# Altium PCB PCB1.PcbDoc
Units mm, origin at the board's own origin, x right, y up, seen from the top; angles counter-clockwise.
Board outline 150.13 x 90 mm, 4 copper layers (Top, GND02, PWR03, BOTTOM), stack 0.603 mm thick; 256 components, 186 nets, 779 pads, 0 vias.
Unrouted connection lines stored in the file: 541.
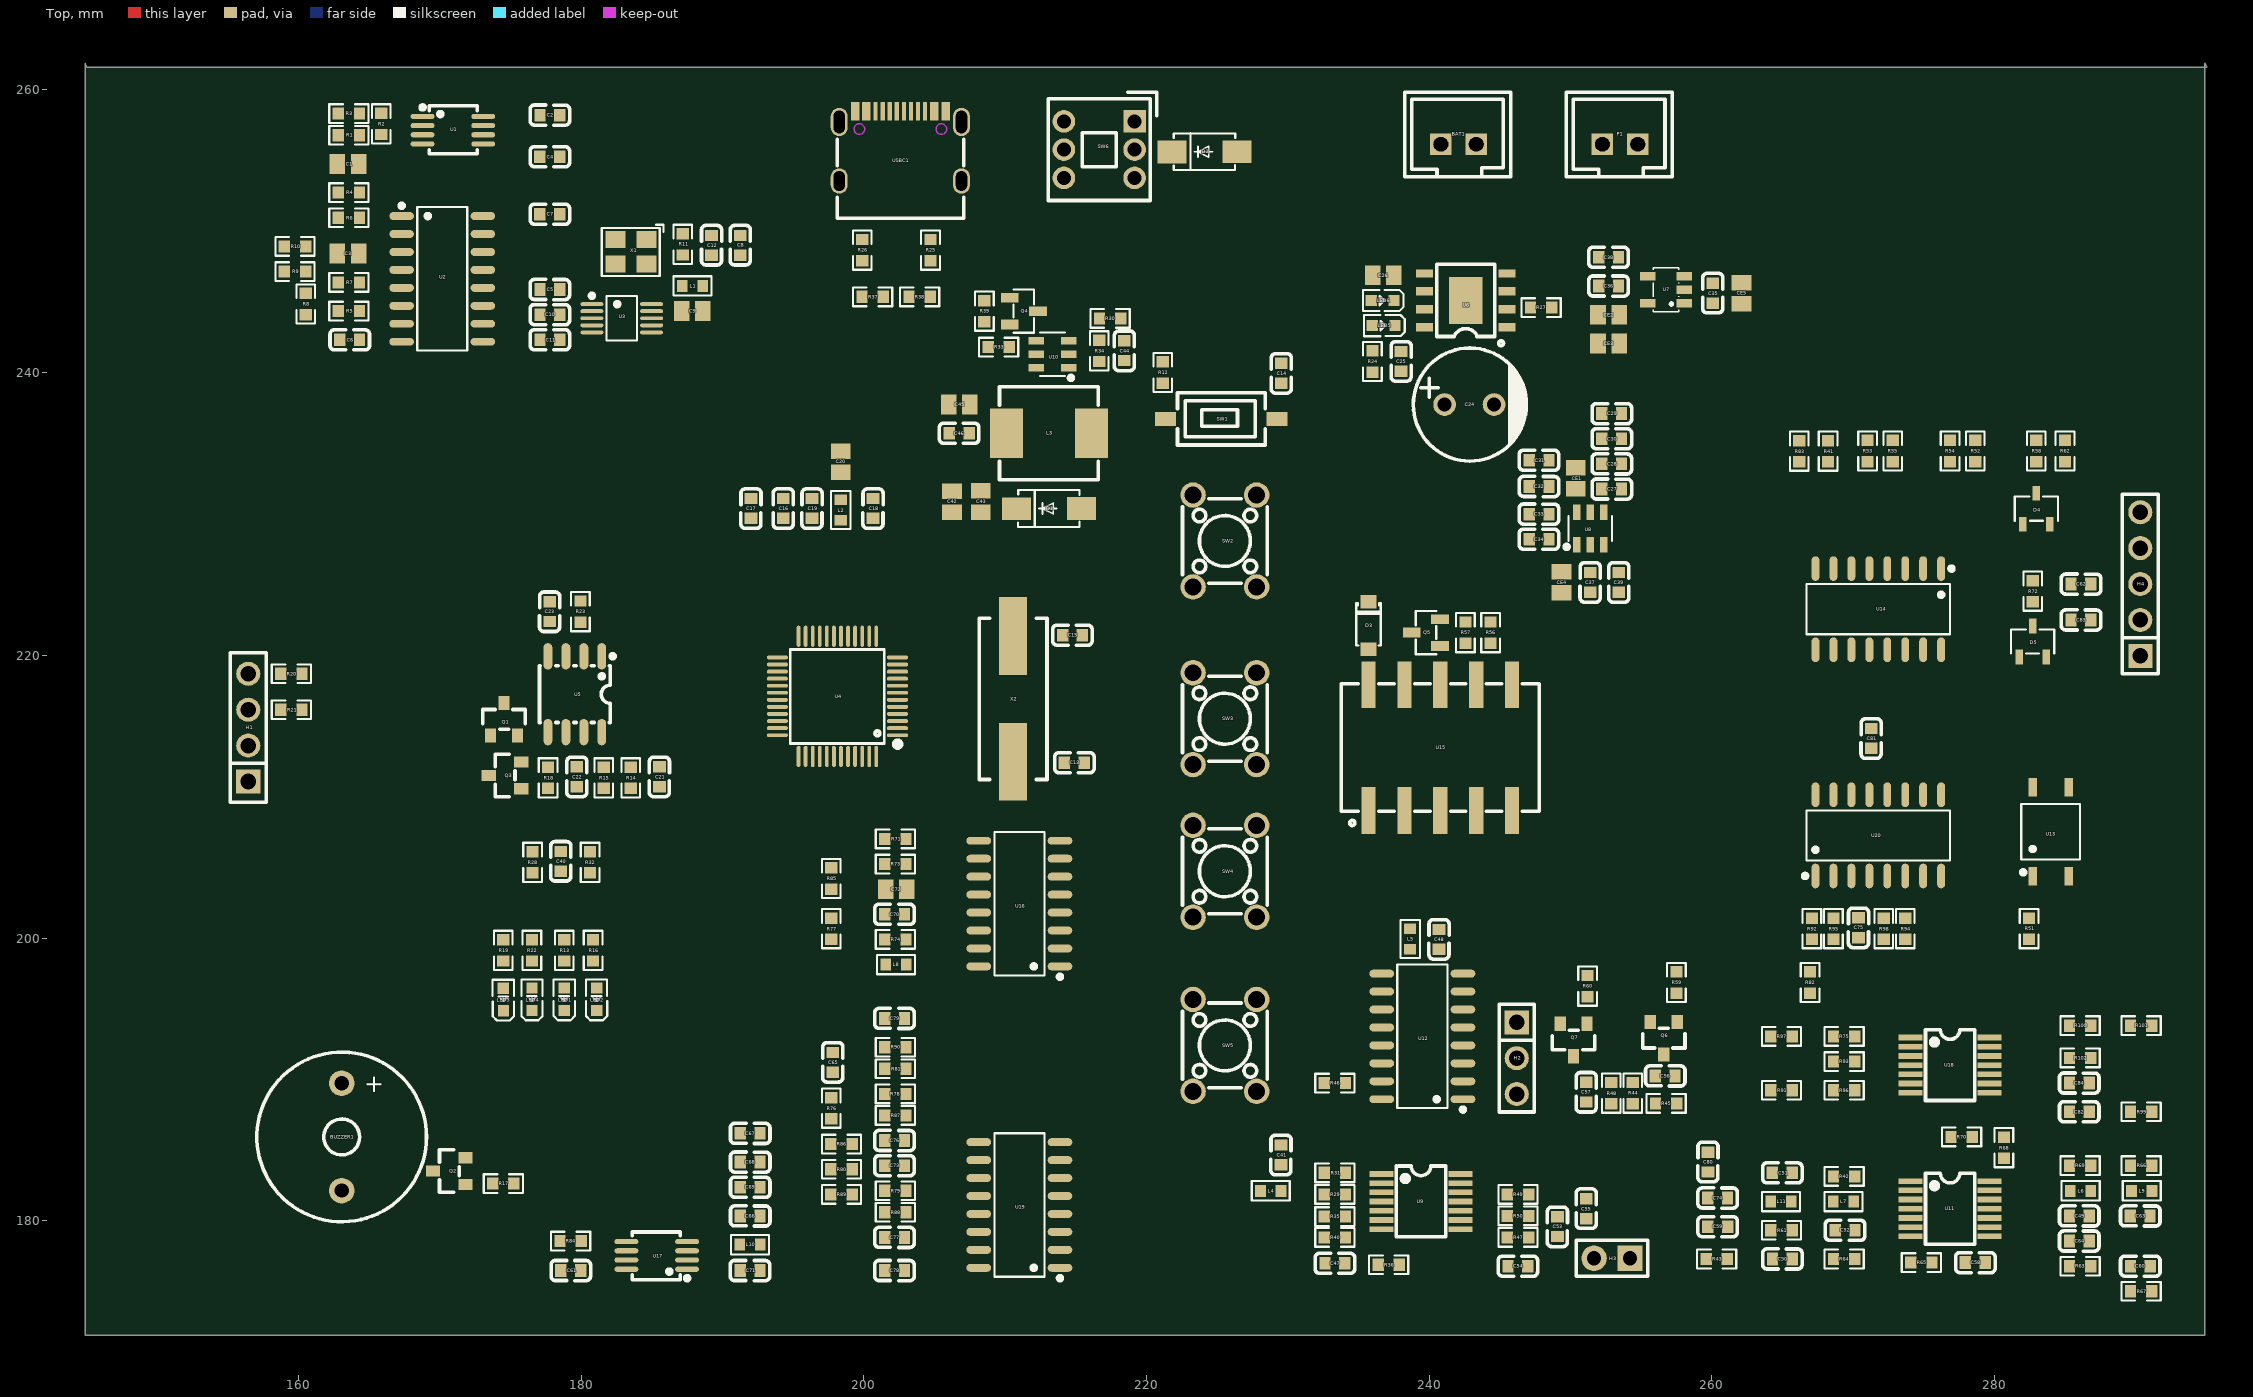
[diagram p0: Top view]
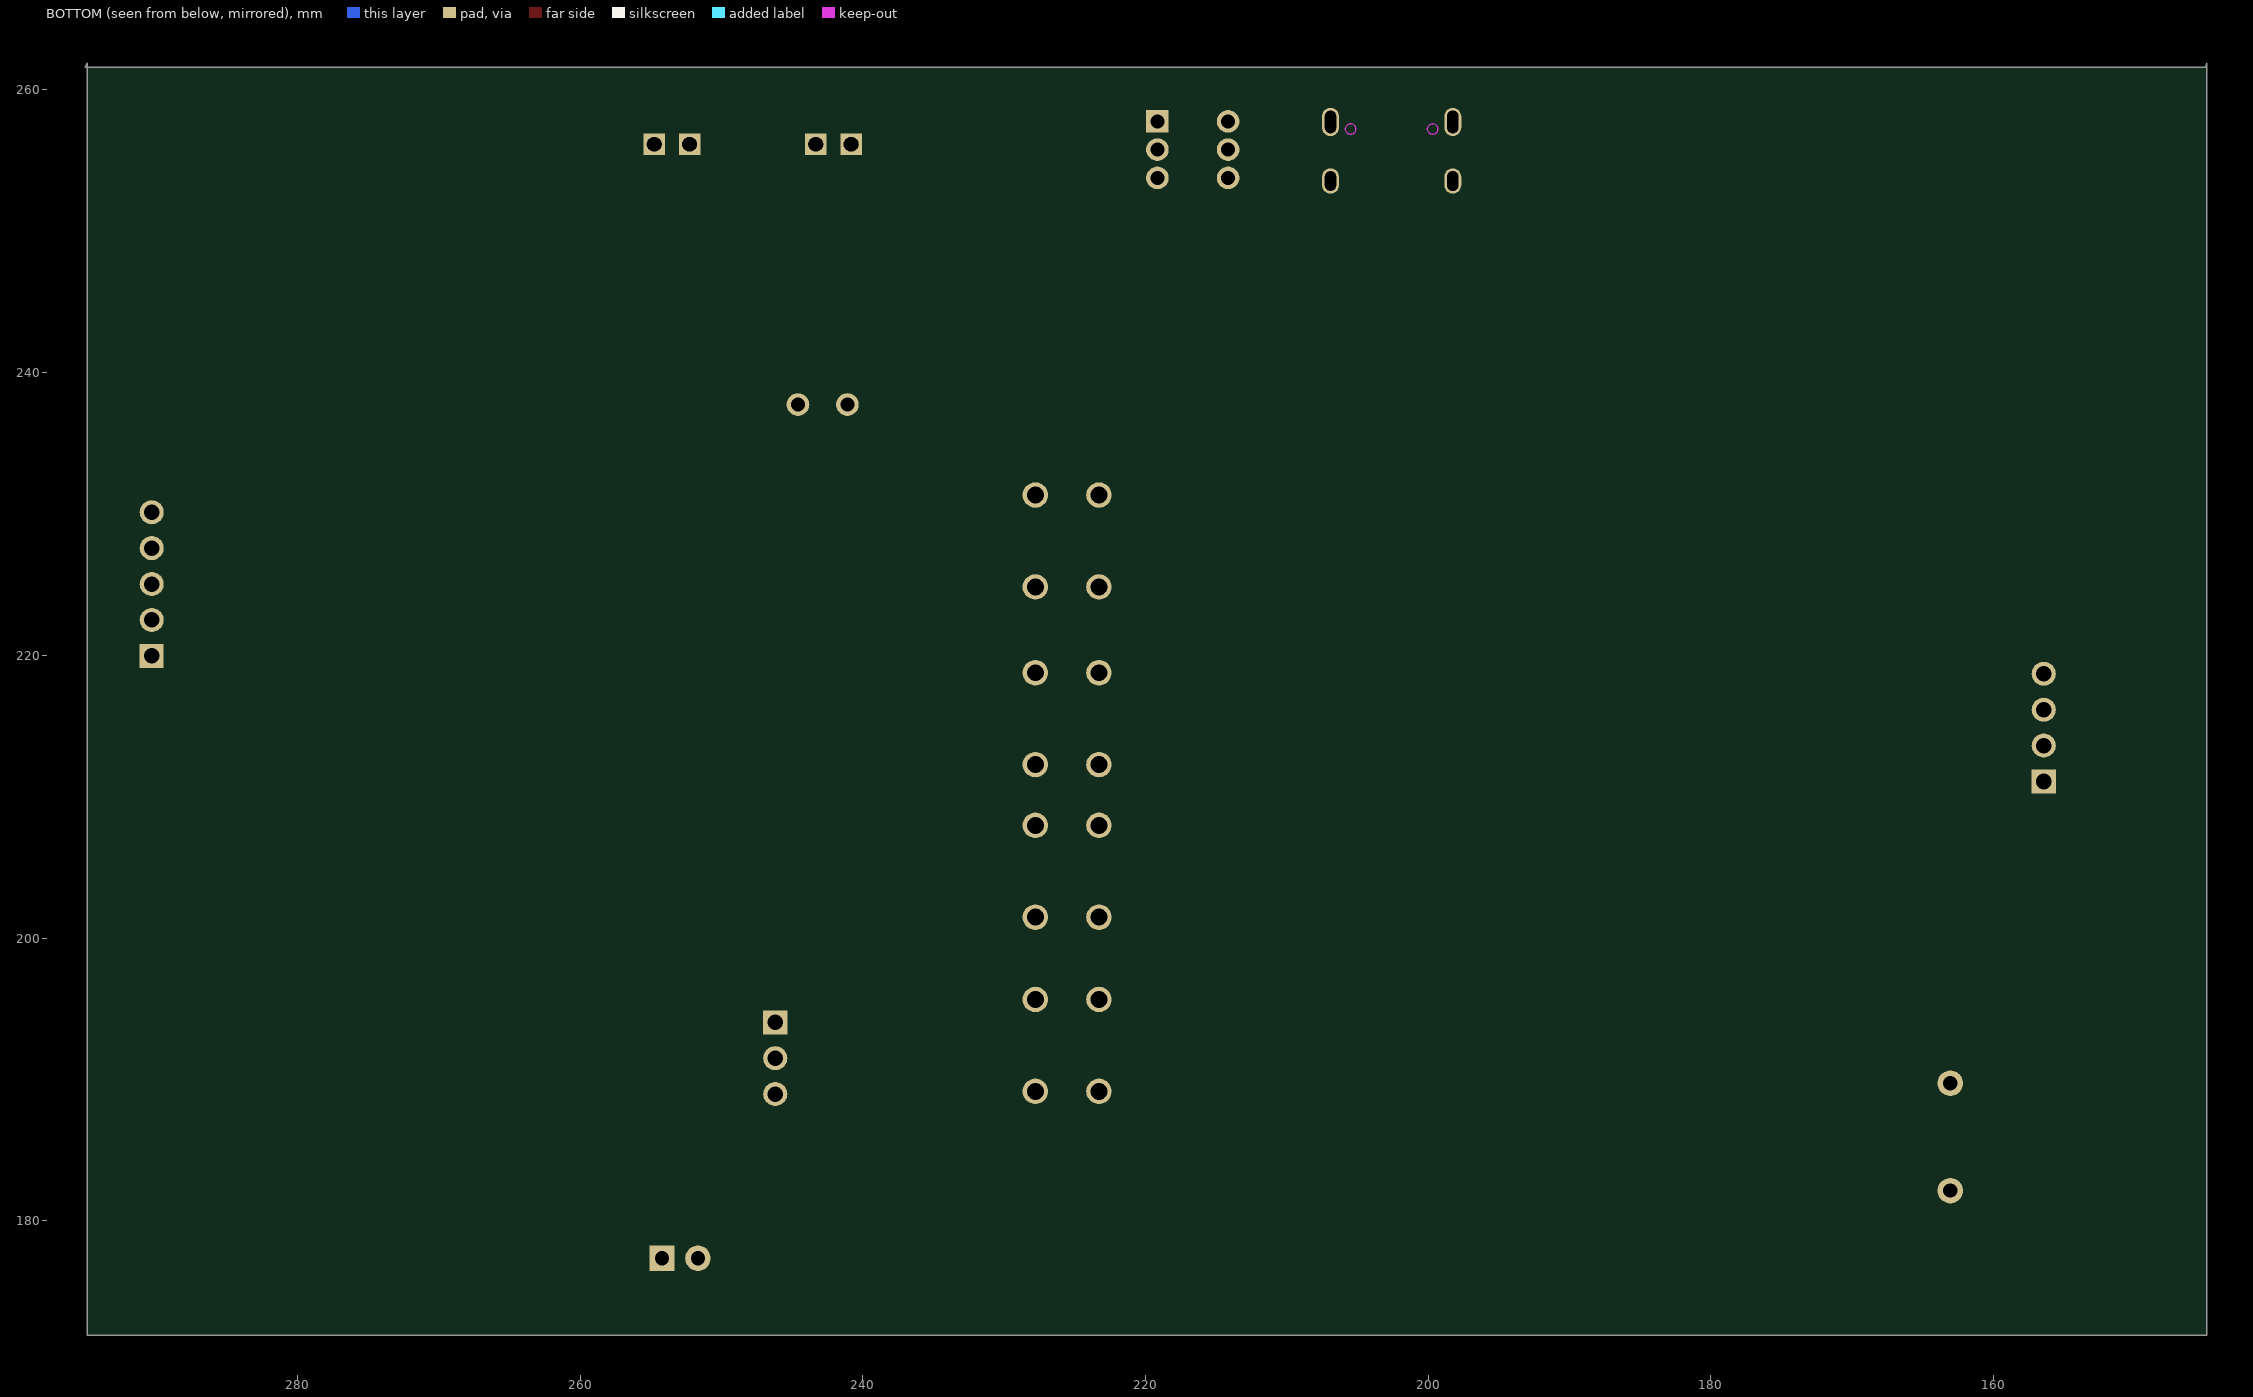
[diagram p1: BOTTOM view, seen from below]
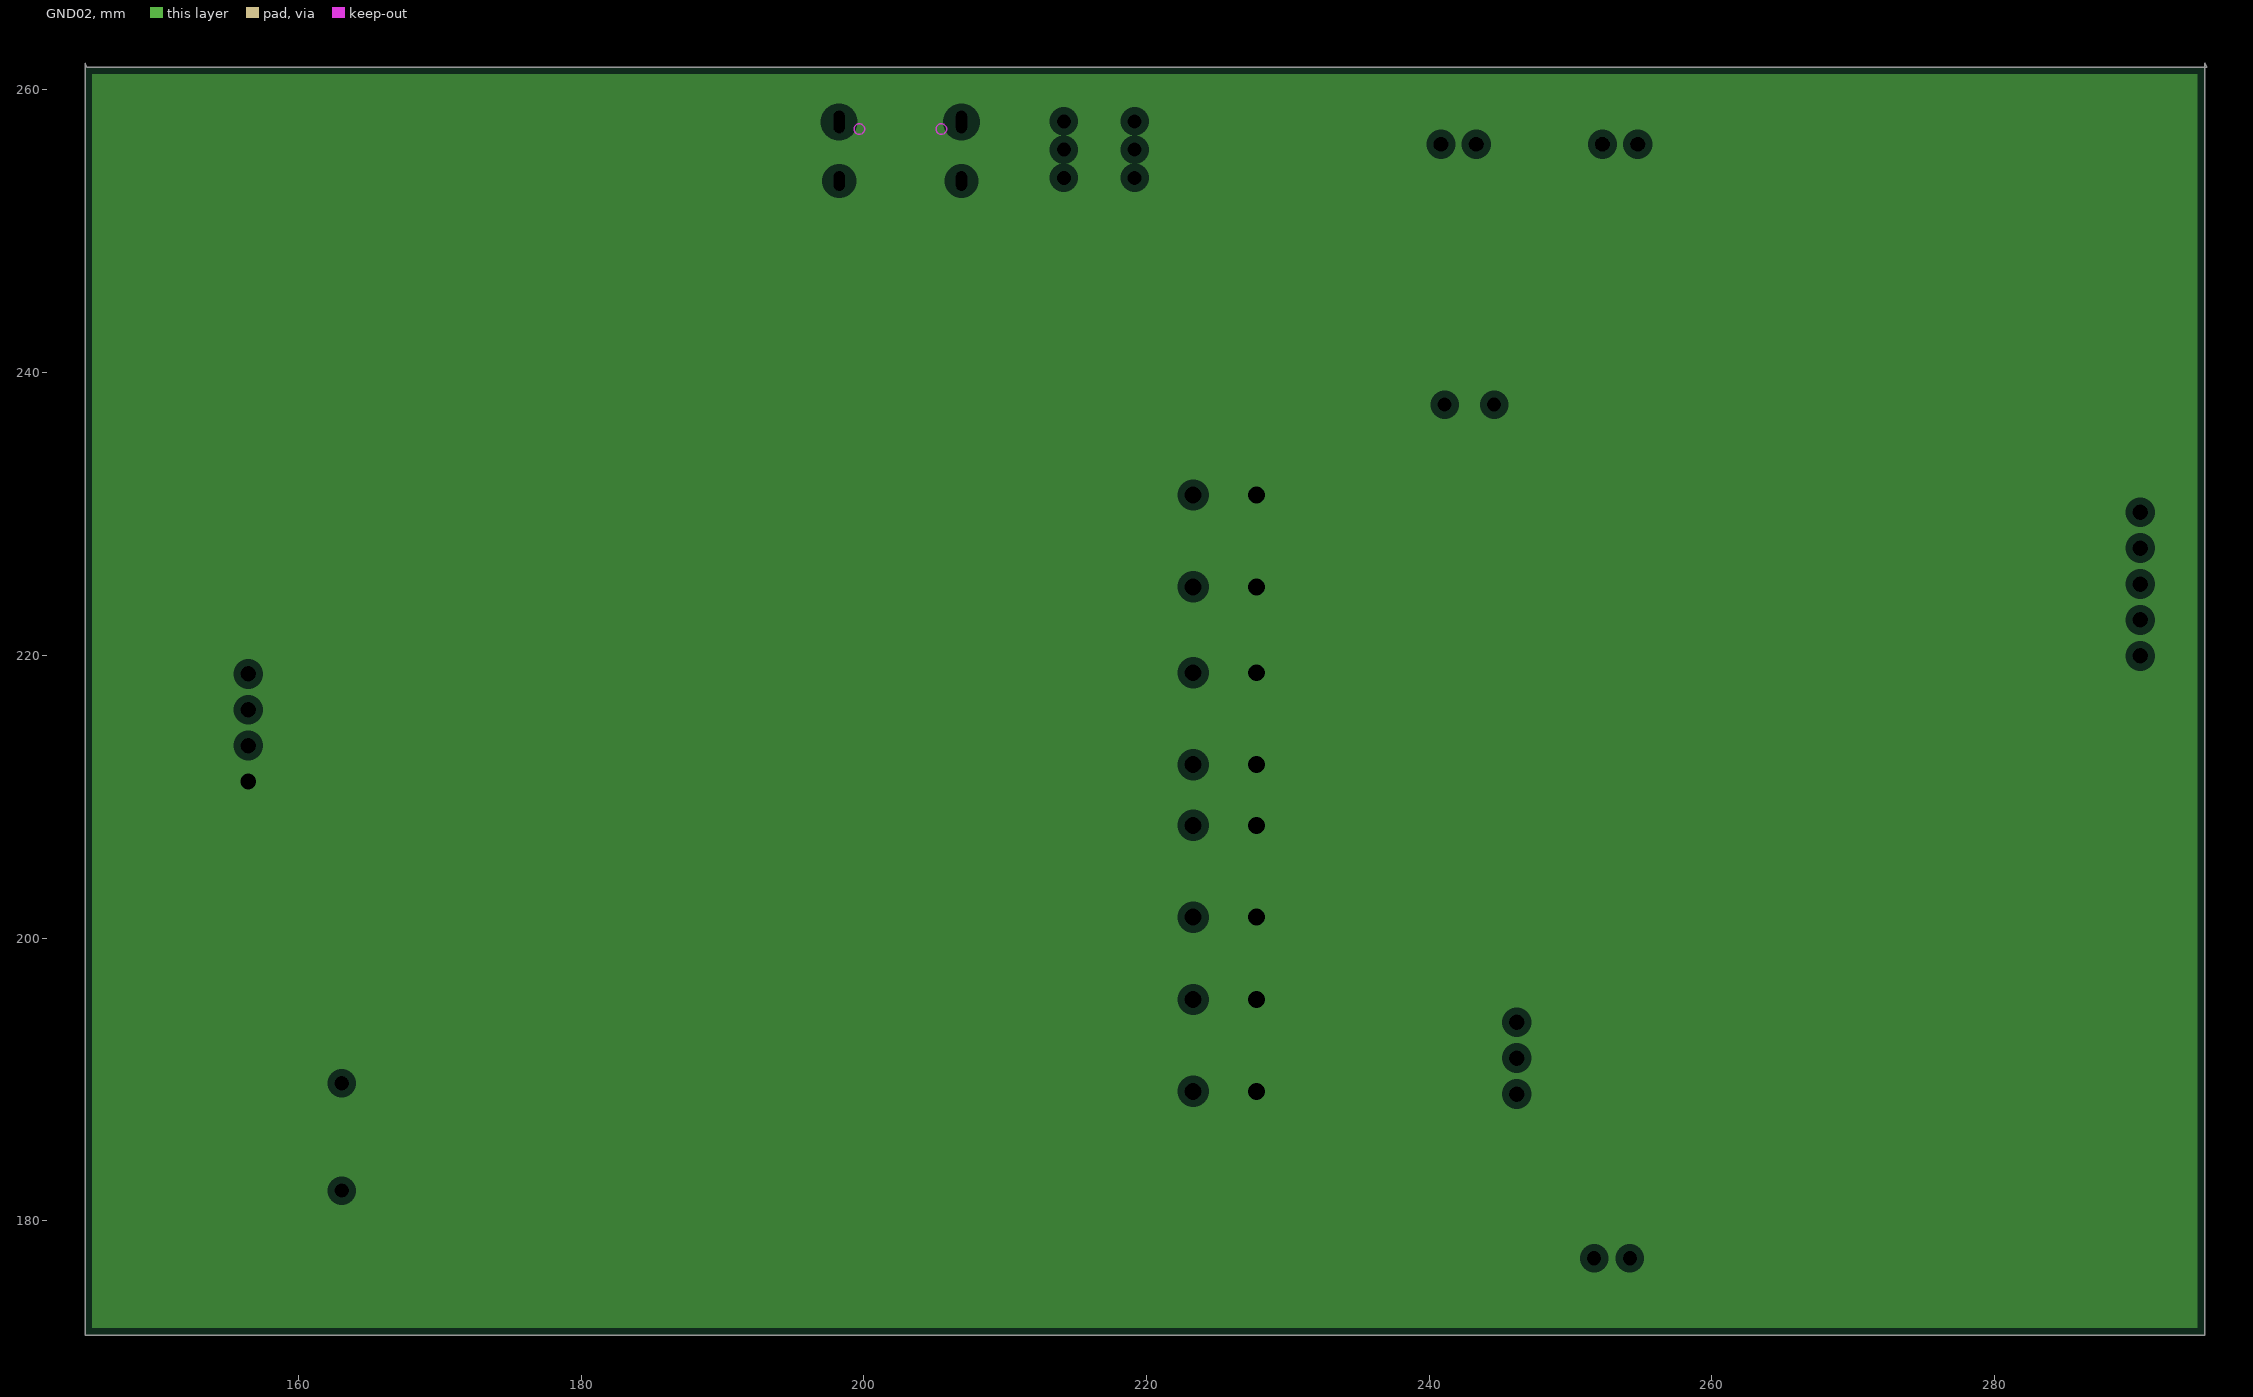
[diagram p2: GND02, clearances drawn from the general rule]
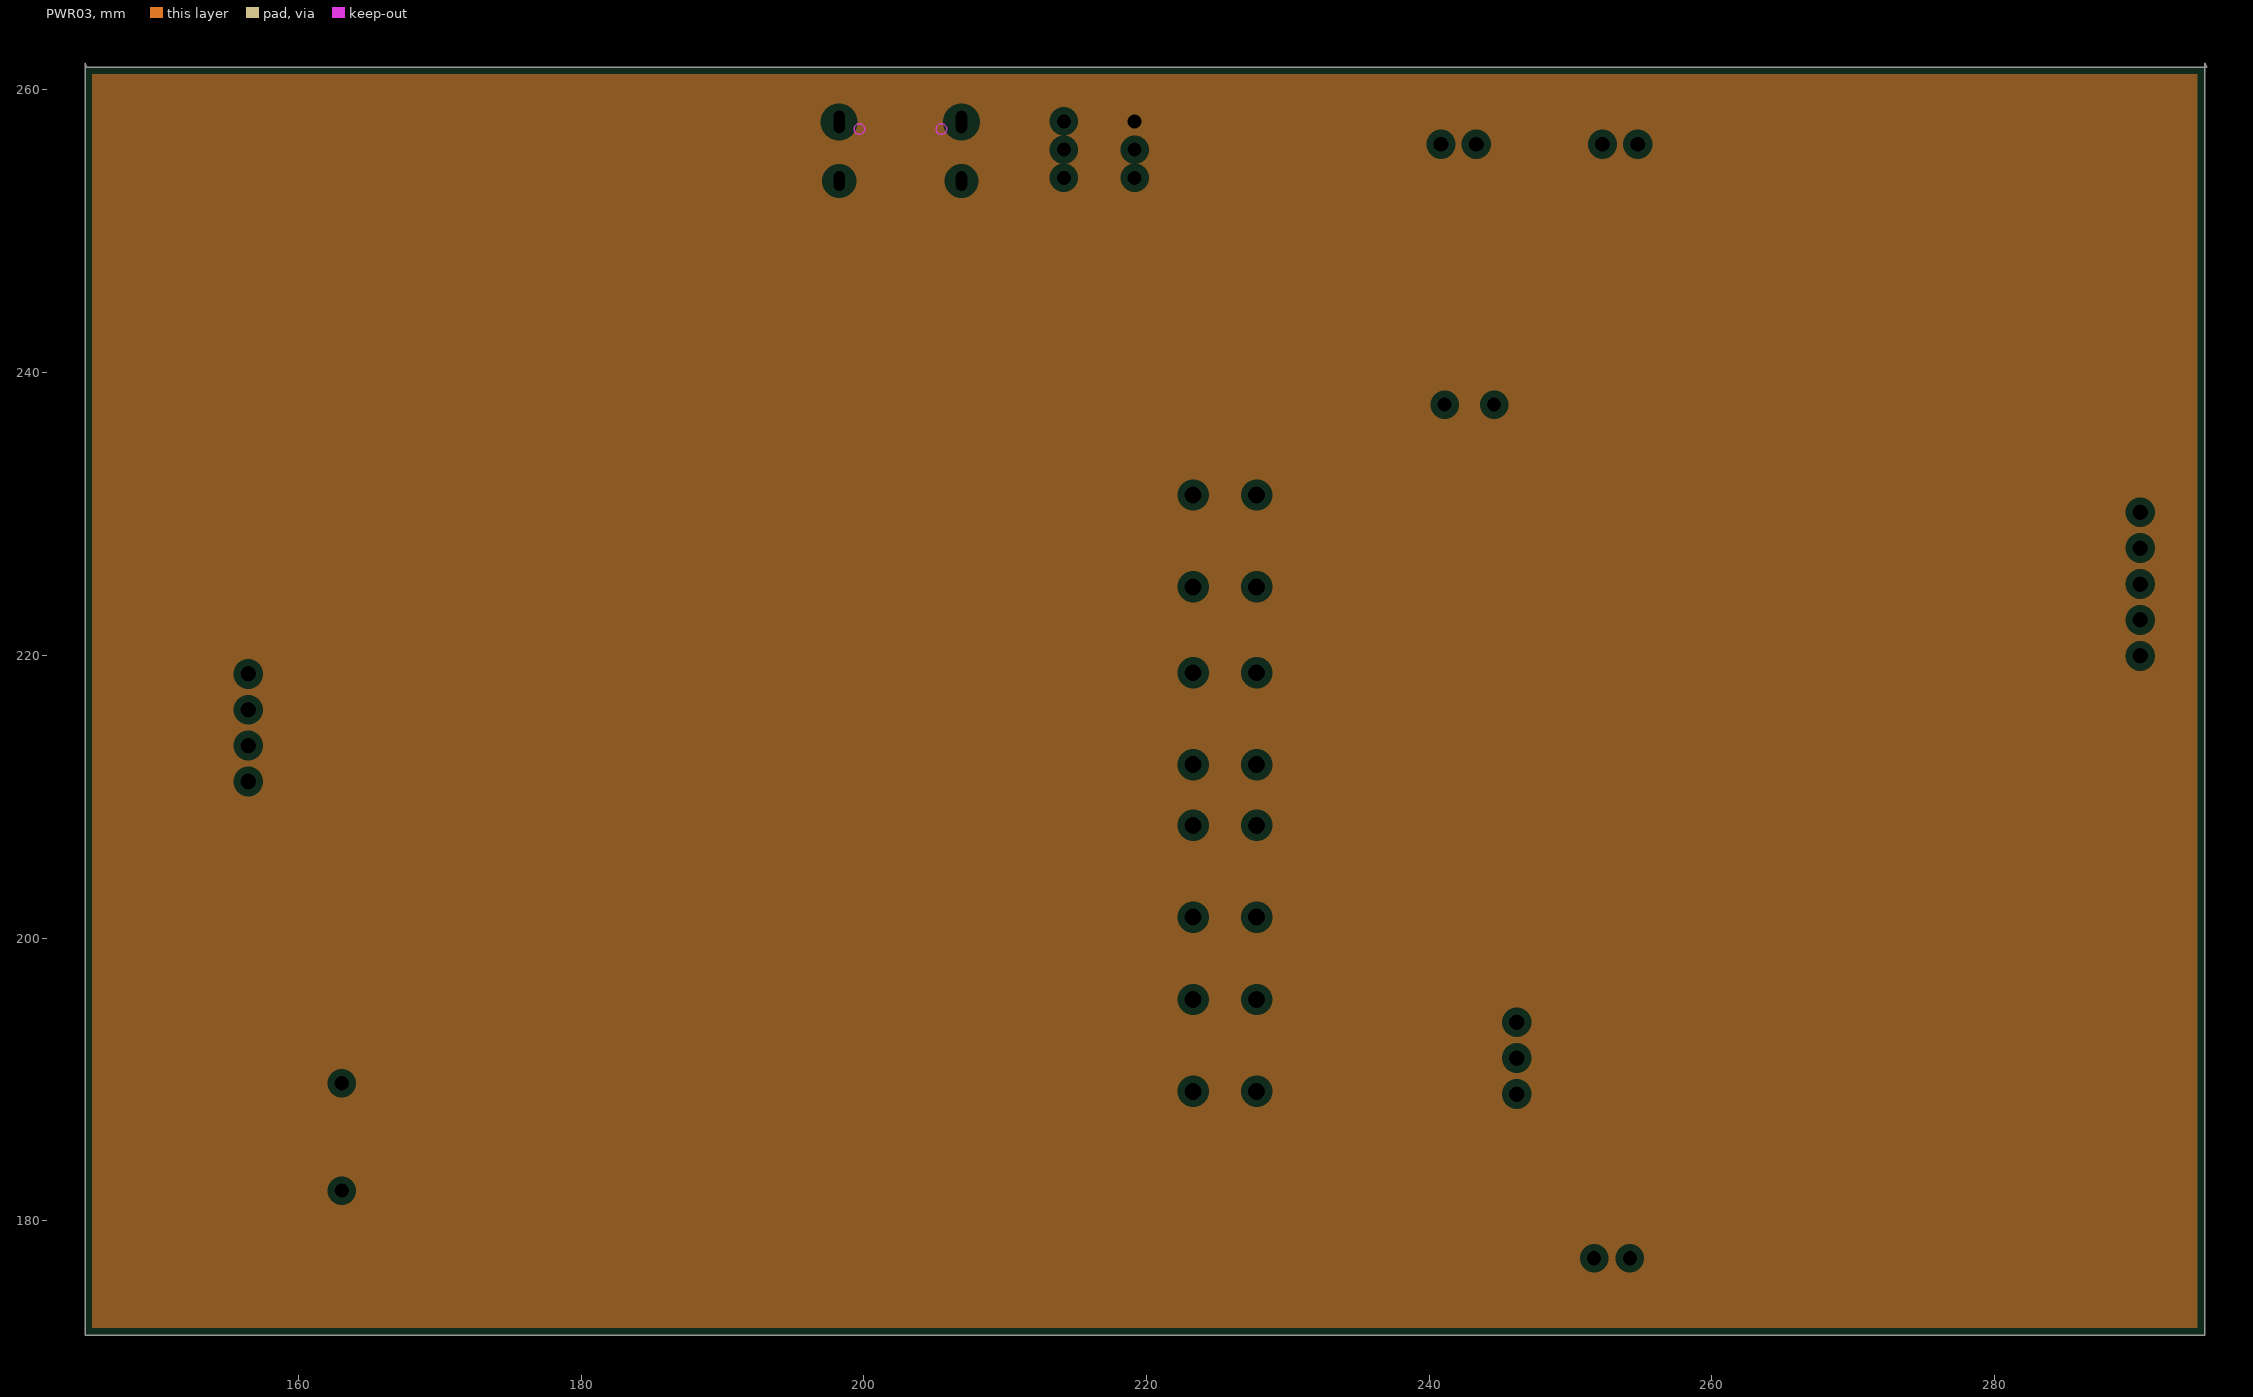
[diagram p3: PWR03, clearances drawn from the general rule]

## Layer stack, top to bottom
Top Solder: solder mask 0.0102, Solder Resist, Dk 3.5
Top: signal copper 0.0356
Dielectric 2: prepreg 0.0711, PP-006, Dk 4.1
GND02: plane copper 0.035, net GND
Dielectric 1: dielectric 0.32, FR-4, Dk 4.8
PWR03: plane copper 0.035, net +5V
Dielectric 3: prepreg 0.0711, PP-006, Dk 4.1
BOTTOM: signal copper 0.0356
Bottom Solder: solder mask 0.0102, Solder Resist, Dk 3.5

## Board outline
144.907,171.907 294.869,171.907 294.869,261.907 295.034,261.62 145.034,261.62 144.907,261.907

## Design rules (kind name [scope] priority, off if disabled: settings)
Clearance [All] p1: gap=0.254 ignorepadtopadclearanceinfootprint=FALSE except(0: Arc-Hole Track-Hole SMDPad-Hole THPad-Hole Via-Hole Fill-Hole Poly-Hole Region-Hole Text-Hole)
PlaneClearance [All] p1: clearance=0.508
PlaneConnect [All] p1: planeconnectstyle=Relief reliefexpansion=0.508 reliefentries=4 reliefconductorwidth=0.254 reliefairgap=0.254
PolygonConnect [All] p1: connectstyle=Relief reliefconductorwidth=0.254 reliefentries=4 polygonreliefangle="90 Angle" airgapwidth=0.254
RoutingVias [All] p1: holewidth=0.711 width=1.27 viastyle="Through Hole" minholewidth=0.711 minwidth=1.27 maxholewidth=0.711 maxwidth=1.27
SolderMaskExpansion [All] p1: expansion=0.102
Width [All] p1: maxlimit=0.254 minlimit=0.254 preferedwidth=0.254
28 further rules are at their usual default settings.

## Classes and differential pairs
net class PWR: +1.4V_VREF +2.8V_VREF +5V +5V_MCU +A2.8V -A2.8V AGND GND PGND VBAT VBAT_OUT VIN_5V

## Components (designator, comment, footprint, x,y, rotation, side; value= is the part's Value field where it differs from the comment)
BAT1 "XH2.54直插座-2P" CONN-TH_XH2.54-2P 242.082,256.159 r0 top
BUZZER1 "TMB12A05_C96093" BUZ-TH_BD12.0-P7.60-D0.6-FD 163.068,185.928 r270 top
C1 "10uF" C0805 163.516,254.77 r180 top
C2 "100nF" C0603 177.8,258.22 r0 top
C3 "10uF" C0805 163.516,248.42 r0 top
C4 "CAP_0603" C0603 177.785,255.278 r180 top value=22pF_NC
C5 "CAP_0603" C0603 177.8,245.88 r0 top value=10nF
C6 "CAP_0603" C0603 163.632,242.324 r180 top value=22pF
C7 "CAP_0603" C0603 177.785,251.214 r180 top value=100nF
C8 "CAP_0603" C0603 191.262,249.009 r270 top value=100nF
C9 "CAP_0805" C0805 187.863,244.356 r0 top value=22uF
C10 "CAP_0603" C0603 177.8,244.102 r0 top value=100nF
C11 "CAP_0603" C0603 177.8,242.324 r0 top value=100nF
C12 "CAP_0603" C0603 189.23,249.009 r270 top value=100nF
C13 "CAP_0603" C0603 214.897,212.408 r180 top value=22pF
C14 "CAP_0603" C0603 229.541,239.959 r90 top value=100nF
C15 "CAP_0603" C0603 214.77,221.425 r0 top value=22pF
C16 "CAP_0603" C0603 194.31,230.39 r90 top value=100nF
C17 "CAP_0603" C0603 192.024,230.39 r90 top value=100nF
C18 "CAP_0603" C0603 200.66,230.39 r90 top value=1uF
C19 "CAP_0603" C0603 196.342,230.39 r90 top value=10nF
C20 "CAP_0805" C0805 198.374,233.692 r90 top value=22uF
C21 "CAP_0805" C0603 185.547,211.408 r90 top value=100nF
C22 "CAP_0805" C0603 179.705,211.408 r90 top value=100nF
C23 "CAP_0805" C0603 177.779,223.092 r90 top value=100nF
C24 "KNH2220UF35V149EC0049" CAP-TH_BD8.0-P3.50-D0.6-FD-2 242.844,237.744 r0 top value=220uF
C25 "CAP_0603" C0603 238.018,240.792 r270 top value=100nF
C26 "CAP_0805" C0805 236.748,246.888 r0 top value=22uF
C27 "104" C0603 252.918,231.769 r180 top
C28 "104" C0603 252.918,233.547 r180 top
C29 "104" C0603 252.918,237.103 r180 top
C30 "104" C0603 252.918,235.325 r180 top
C31 "104" C0603 247.776,233.801 r0 top
C32 "104" C0603 247.783,231.942 r0 top
C33 "104" C0603 247.776,229.991 r0 top
C34 "104" C0603 247.776,228.213 r0 top
C35 "104" C0603 260.066,245.618 r270 top
C36 "104" C0603 252.7,246.126 r0 top
C37 "104" C0603 251.394,225.165 r90 top
C38 "104" C0603 252.7,248.158 r0 top
C39 "104" C0603 253.426,225.165 r90 top
C40 "CAP_0603" C0603 178.562,205.424 r270 top value=100nF
C41 "CAP_0603" C0603 229.521,184.658 r90 top value=100nF
C42 "CAP_0805" C0805 206.248,230.874 r270 top value=22uF
C43 "CAP_0805" C0805 208.28,230.886 r270 top value=22uF
C44 "CAP_0603" C0603 218.44,241.554 r90 top value=100nF
C45 "CAP_0805" C0805 206.756,237.744 r0 top value=22uF
C46 "CAP_0603" C0603 206.756,235.712 r0 top value=100nF
C47 "CAP_0603" C0603 233.331,176.987 r180 top value=100nF
C48 "CAP_0603" C0603 240.697,199.898 r270 top value=100nF
C49 "CAP_0402" C0603 286.004,180.34 r0 top value=100nF
C50 "CAP_0402" C0603 264.999,177.292 r0 top value=100pF_NC
C51 "CAP_0402" C0603 264.984,183.388 r180 top value=1uF
C52 "CAP_0402" C0603 269.432,179.324 r0 top value=100nF
C53 "CAP_0603" C0603 249.079,179.578 r90 top value=4.7nF
C54 "CAP_0603" C0603 246.285,176.784 r0 top value=470nF
C55 "CAP_0603" C0603 251.111,180.848 r270 top value=100nF
C56 "CAP_0603" C0603 256.699,190.246 r180 top value=470nF_NC
C57 "CAP_0603" C0603 251.111,189.095 r90 top value=470nF_NC
C58 "CAP_0402" C0603 278.638,177.038 r180 top value=100pF_NC
C59 "CAP_0402" C0603 260.421,179.578 r0 top value=220nF
C60 "CAP_0402" C0603 290.322,176.784 r0 top value=220nF
C61 "CAP_0603" C0603 179.271,176.479 r180 top value=100nF
C62 "CAP_0402" C0603 286.115,225.044 r180 top value=220nF
C63 "CAP_0402" C0603 290.307,180.34 r180 top value=100nF
C64 "CAP_0402" C0603 286.004,178.562 r0 top value=100pF_NC
C65 "CAP_0603" C0603 197.804,191.2 r270 top value=100nF
C66 "CAP_0603" C0603 191.962,180.34 r180 top value=100pF
C67 "CAP_0603" C0603 191.962,186.182 r180 top value=1nF
C68 "CAP_0603" C0603 191.962,184.15 r180 top value=10nF
C69 "CAP_0603" C0603 191.962,182.372 r180 top value=100nF
C70 "CAP_0603" C0603 202.184,201.676 r0 top value=100pF
C71 "CAP_0603" C0603 191.962,176.474 r0 top value=100nF
C72 "CAP_0603" C0805 202.299,203.454 r0 top value=22uF
C73 "CAP_0603" C0603 202.184,183.896 r0 top value=100nF
C74 "CAP_0402" C0603 260.406,181.61 r180 top value=100nF
C75 "CAP_0402" C0603 270.383,200.731 r90 top value=100pF
C76 "CAP_0603" C0603 202.184,185.674 r0 top value=100pF
C77 "CAP_0603" C0603 202.184,178.816 r0 top value=1nF
C78 "CAP_0603" C0603 202.184,176.474 r0 top value=10nF
C79 "CAP_0603" C0603 202.184,194.31 r0 top value=100nF
C80 "CAP_0402" C0603 259.726,184.15 r270 top value=100pF_NC
C81 "CAP_0402" C0603 271.272,214.122 r90 top value=220nF
C82 "CAP_0402" C0603 286.004,187.706 r0 top value=220nF
C83 "CAP_0402" C0603 286.115,222.504 r180 top value=220nF
C84 "CAP_0402" C0603 286.004,189.738 r0 top value=100pF_NC
CE1 "3.3uF/16V" C0805 250.378,232.531 r90 top
CE2 "22uF/16V" C0805 252.7,244.094 r180 top
CE3 "22uF/16V" C0805 252.7,242.062 r180 top
CE4 "22uF/16V" C0805 249.362,225.165 r270 top
CE5 "22uF/16V" C0805 262.098,245.618 r90 top
D1 "SS24_C7420362" SMA_L4.3-W2.6-LS5.0-FD 213.106,230.378 r180 top
D2 "SS24_C7420362" SMA_L4.3-W2.6-LS5.0-FD 224.115,255.619 r180 top
D3 "FR107_C963379" SOD-123_L2.8-W1.8-LS3.7-RD 235.712,222.113 r270 top
D4 "BAT54S,215" SOT-23-3_L3.0-W1.7-P0.95-LS2.9-BR 282.956,230.378 r270 top
D5 "BAT54S,215" SOT-23-3_L3.0-W1.7-P0.95-LS2.9-BR 282.702,220.98 r270 top
H1 "" HDR-TH_4P-P2.54-V-F 156.455,214.884 r90 top
H2 "" HDR-TH_3P-P2.54-V-M 246.201,191.5 r270 top
H3 "HDR-M_2.54_1x2P" HDR-TH_2P-P2.54-V-M-1 252.941,177.344 r180 top
H4 "" HDR-TH_5P-P2.54-V-M 290.313,225.044 r90 top
L1 "L_0603" L0603 187.884,246.134 r0 top value=10uH
L2 "BLM15AG102SN1D" L0603 198.374,230.28 r270 top
L3 "FXL0630-100-M" IND-SMD_L7.3-W6.8 213.106,235.712 r180 top
L4 "L_0603" L0603 228.796,182.118 r180 top value=10uH
L5 "L_0603" L0603 238.665,199.935 r270 top value=10uH
L6 "BLM15AG102SN1D" L0603 286.099,182.118 r180 top
L7 "BLM15AG102SN1D" L0603 269.322,181.356 r180 top
L8 "L_0603" L0603 202.279,198.12 r0 top value=10uH
L9 "BLM15AG102SN1D" L0603 290.417,182.118 r0 top
L10 "L_0603" L0603 191.962,178.308 r0 top value=10uH
L11 "BLM15AG102SN1D" L0603 264.889,181.356 r180 top
LED1 "LED_0603-R" LED_0603 178.811,195.72 r90 top
LED2 "LED_0603-R" LED_0603 181.097,195.72 r90 top
LED3 "LED_0603-R" LED_0603 174.498,195.707 r90 top
LED4 "LED_0603-R" LED_0603 176.525,195.72 r90 top
LED5 "LED_0603-R" LED_0603 236.735,243.327 r180 top
LED6 "LED_0603-R" LED_0603 236.659,245.1 r180 top
P1 "XH2.54直插座-2P" CONN-TH_XH2.54-2P 253.512,256.159 r0 top
Q1 "AO3401A_P" AO3401A_SOT-23-3 174.551,215.472 r270 top
Q2 "S8050_SOT_NPN" S8050_SOT-23 170.688,183.388 r0 top
Q3 "AO3401A_P" AO3401A_SOT-23-3 174.625,211.502 r0 top
Q4 "" SOT-23-3_L2.9-W1.3-P1.90-LS2.4-BR 211.328,244.348 r180 top
Q5 "AO3400A_C20917" SOT-23-3_L2.9-W1.3-P1.90-LS2.4-BR 239.776,221.605 r0 top
Q6 "S8050_SOT_NPN" S8050_SOT-23 256.732,192.92 r90 top
Q7 "S8050_SOT_NPN" S8050_SOT-23 250.349,192.786 r90 top
R1 "Res_0603" R0603 163.576,256.802 r0 top value=10K
R2 "Res_0603" R0603 165.862,257.602 r90 top value=10K
R3 "Res_0603" R0603 163.576,258.326 r180 top value=10K
R4 "Res_0603" R0603 163.576,252.738 r180 top value=10K
R5 "Res_0603" R0603 163.576,244.356 r180 top value=10K_NC
R6 "Res_0603" R0603 163.576,250.96 r180 top value=10K_NC
R7 "Res_0603" R0603 163.576,246.388 r180 top value=10K_NC
R8 "Res_0603" R0603 160.528,244.864 r270 top value=10K
R9 "Res_0603" R0603 159.766,247.15 r180 top value=1k
R10 "Res_0603" R0603 159.766,248.928 r0 top value=1k
R11 "Res_0603" R0603 187.198,249.081 r270 top value=10K
R12 "Res_0603" R0603 221.159,240.015 r270 top value=10K
R13 "Res_0603" R0603 178.816,199.127 r270 top value=510
R14 "Res_0805" R0603 183.515,211.337 r270 top value=100
R15 "Res_0805" R0603 181.61,211.337 r270 top value=100
R16 "Res_0603" R0603 180.848,199.127 r270 top value=2k
R17 "Res_0603" R0603 174.498,182.626 r180 top value=510
R18 "Res_0805" R0603 177.673,211.337 r90 top value=10K
R19 "Res_0603" R0603 174.498,199.127 r270 top value=2k
R20 "Res_0603" R0603 159.503,218.694 r180 top value=10K
R21 "Res_0603" R0603 159.503,216.154 r180 top value=10K
R22 "Res_0603" R0603 176.53,199.127 r270 top value=2k
R23 "Res_0805" R0603 179.959,223.092 r90 top value=10K
R24 "Res_0603" R0603 235.986,240.783 r270 top value=2k
R25 "Res_0603" R0603 204.724,248.666 r90 top value=5.1K
R26 "Res_0603" R0603 199.898,248.666 r270 top value=5.1K
R27 "Res_0603" R0603 247.924,244.602 r180 top value=1k
R28 "Res_0603" R0603 176.572,205.36 r90 top value=10K
R29 "Res_0603" R0603 233.331,181.864 r0 top value=10K
R30 "Res_0603" R0603 217.433,243.84 r0 top value=11k
R31 "Res_0603" R0603 233.331,183.388 r180 top value=10K
R32 "Res_0603" R0603 180.636,205.36 r270 top value=10K
R33 "Res_0603" R0603 209.55,241.808 r0 top value=10k
R34 "Res_0603" R0603 216.662,241.545 r90 top value=1.5k
R35 "Res_0603" R0603 233.331,180.29 r180 top value=10k_0.1%
R36 "Res_0603" R0603 237.141,176.881 r0 top value=000
R37 "Res_0603" R0603 200.634,245.364 r180 top value=000
R38 "Res_0603" R0603 203.953,245.364 r180 top value=000
R39 "Res_0603" R0603 208.534,244.348 r270 top value=10k
R40 "Res_0603" R0603 233.331,178.816 r0 top value=10k_0.1%
R41 "Res_0603" R0603 268.224,234.442 r270 top value=1M
R42 "Res_0603" R0603 269.361,183.134 r180 top value=100
R43 "Res_0603" R0603 260.35,177.292 r180 top value=5.1K
R44 "Res_0603" R0603 254.413,189.024 r270 top value=10K_0.1%
R45 "Res_0603" R0603 256.77,188.299 r0 top value=10K_0.1%
R46 "Res_0603" R0603 233.331,189.738 r0 top value=51K
R47 "Res_0603" R0603 246.285,178.816 r0 top value=51K
R48 "Res_0603" R0603 252.889,189.024 r270 top value=10K
R49 "Res_0603" R0603 246.285,181.864 r0 top value=10K_0.1%
R50 "Res_0603" R0603 246.285,180.34 r0 top value=10K_0.1%
R51 "Res_0603" R0603 282.448,200.66 r90 top value=1k
R52 "Res_0603" R0603 278.638,234.451 r270 top value=100k
R53 "Res_0603" R0603 271.018,234.451 r270 top value=10k
R54 "Res_0603" R0603 276.86,234.451 r270 top value=1k
R55 "Res_0603" R0603 272.796,234.451 r270 top value=20
R56 "Res_0603" R0603 244.348,221.605 r90 top value=10K
R57 "Res_0603" R0603 242.57,221.605 r270 top value=10K
R58 "Res_0603" R0603 282.956,234.451 r90 top value=20
R59 "Res_0603" R0603 257.495,196.85 r90 top value=510
R60 "Res_0603" R0603 251.211,196.596 r270 top value=510
R61 "Res_0603" R0603 264.928,179.324 r0 top value=1M
R62 "Res_0603" R0603 284.988,234.451 r270 top value=1k
R63 "Res_0603" R0603 286.06,176.784 r0 top value=3k
R64 "Res_0603" R0603 269.361,177.292 r0 top value=100
R65 "Res_0603" R0603 274.828,177.038 r0 top value=1k_0.1%
R66 "Res_0603" R0603 290.378,183.896 r0 top value=1M
R67 "Res_0603" R0603 290.378,175.006 r0 top value=100
R68 "Res_0603" R0603 280.67,185.166 r90 top value=1k_0.1%
R69 "Res_0603" R0603 286.06,183.896 r180 top value=100
R70 "Res_0603" R0603 277.678,185.928 r0 top value=3k
R71 "Res_0603" R0603 202.24,207.01 r180 top value=1k
R72 "Res_0603" R0603 282.702,224.536 r270 top value=1k
R73 "Res_0603" R0603 202.24,205.232 r0 top value=1k
R74 "Res_0603" R0603 202.24,199.898 r180 top value=3k
R75 "Res_0603" R0603 269.361,193.04 r180 top value=000
R76 "Res_0603" R0603 197.704,187.96 r90 top value=1M
R77 "Res_0603" R0603 197.704,200.66 r90 top value=10k
R78 "Res_0603" R0603 202.24,188.976 r180 top value=16K
R79 "Res_0603" R0603 202.24,182.118 r180 top value=16K
R80 "Res_0603" R0603 198.428,183.642 r180 top value=16K
R81 "Res_0603" R0603 202.24,190.754 r180 top value=16K
R82 "Res_0603" R0603 266.954,196.85 r270 top value=100
R83 "Res_0603" R0603 266.192,234.442 r270 top value=1M
R84 "Res_0603" R0603 179.262,178.562 r180 top value=100
R85 "Res_0603" R0603 197.704,204.207 r90 top value=1M
R86 "Res_0603" R0603 198.428,185.42 r0 top value=1M
R87 "Res_0603" R0603 202.24,187.452 r0 top value=16K
R88 "Res_0603" R0603 202.24,180.594 r0 top value=16K
R89 "Res_0603" R0603 198.428,181.864 r0 top value=16K
R90 "Res_0603" R0603 202.24,192.278 r0 top value=16K
R91 "Res_0603" R0603 264.928,189.23 r0 top value=3k
R92 "Res_0603" R0603 267.081,200.66 r90 top value=20_0.1%
R93 "Res_0603" R0603 269.361,191.262 r0 top value=100
R94 "Res_0603" R0603 273.685,200.66 r90 top value=1k_0.1%
R95 "Res_0603" R0603 268.605,200.66 r90 top value=10k_0.1%
R96 "Res_0603" R0603 269.361,189.23 r180 top value=1k_0.1%
R97 "Res_0603" R0603 264.928,193.04 r0 top value=1M
R98 "Res_0603" R0603 272.161,200.66 r90 top value=100k_0.1%
R99 "Res_0603" R0603 290.378,187.706 r180 top value=100
R100 "Res_0603" R0603 286.06,193.802 r0 top value=1k_0.1%
R101 "Res_0603" R0603 290.378,193.802 r180 top value=3k
R102 "Res_0603" R0603 286.06,191.516 r180 top value=100
SW1 "" Key_SMD_3.6x6.1x2.5 225.298,236.728 r0 top
SW2 "" SW-TH_4P-L6.0-W6.0-P4.50-LS6.5 225.552,228.092 r90 top
SW3 "" SW-TH_4P-L6.0-W6.0-P4.50-LS6.5 225.552,215.519 r90 top
SW4 "" SW-TH_4P-L6.0-W6.0-P4.50-LS6.5 225.552,204.724 r90 top
SW5 "" SW-TH_4P-L6.0-W6.0-P4.50-LS6.5 225.552,192.405 r90 top
SW6 "XKB7070-Z" SW-TH_6P-L7.0-W7.0-P2.00 216.662,255.778 r0 top
U1 "RS8752XM" MSOP-8_L3.0-W3.0-P0.65-LS5.0-BL 170.933,257.153 r270 top
U2 "74HC4052M/TR" SOP-16_L9.9-W3.9-P1.27-LS6.0-BL 170.18,246.634 r270 top
U3 "AD9833BRMZ-REEL7_C9652" MSOP-10_L3.0-W3.0-P0.50-LS5.0-BL 182.88,243.848 r270 top
U4 "STC32G12K128-35I-LQFP48" LQFP-48_L7.0-W7.0-P0.50-LS9.0-BL 198.14,217.102 r90 top
U5 "CH340N" SOP-8_L4.9-W3.9-P1.27-LS6.0-BL 179.563,217.25 r180 top
U6 "TP4056-42-ESOP8" ESOP-8_L4.9-W3.9-P1.27-LS6.0-BL-EP 242.59,245.11 r90 top
U7 "RT9193-28G" SOT-23-5_L3.0-W1.7-P0.95-LS2.8-BR 256.764,245.872 r0 top
U8 "SGM3204" SOT-23-6_L2.9-W1.6-P0.95-LS2.8-BL 251.394,228.975 r0 top
U9 "RS8554XQ" TSSOP-14_L5.0-W4.4-P0.65-LS6.4-BL 239.427,181.356 r270 top
U10 "SX1308" SOT-23-6_L2.9-W1.6-P0.95-LS2.8-BL 213.36,241.3 r90 top
U11 "RS8554XP" TSSOP-14_L5.0-W4.4-P0.65-LS6.4-BL 276.86,180.848 r270 top
U12 "CD4053BDTR(XBLW)" SOP-16_L9.9-W3.9-P1.27-LS6.0-BL 239.522,193.04 r90 top
U13 "GAQY211G2S" SOP-4_L4.4-W4.0-P2.54-LS7.0-TL 283.972,207.518 r90 top
U14 "74HC4052M/TR" SOP-16_L9.9-W3.9-P1.27-LS6.0-BL 271.78,223.266 r180 top
U15 "hfd31/5" RELAY-SMD_HFD31-XX-L2SR 240.792,213.477 r0 top
U16 "74HC4052M/TR" SOP-16_L9.9-W3.9-P1.27-LS6.0-BL 211.012,202.438 r90 top
U17 "RS8752XM" MSOP-8_L3.0-W3.0-P0.65-LS5.0-BL 185.358,177.546 r90 top
U18 "RS8554XP" TSSOP-14_L5.0-W4.4-P0.65-LS6.4-BL 276.86,191.008 r270 top
U19 "74HC4052M/TR" SOP-16_L9.9-W3.9-P1.27-LS6.0-BL 211.012,181.114 r90 top
U20 "74HC4052M/TR" SOP-16_L9.9-W3.9-P1.27-LS6.0-BL 271.78,207.264 r0 top
USBC1 "TYPE-C-31-M-12" USB-C_SMD-TYPE-C-31-M-12 202.591,256.032 r0 top
X1 "OT322525MJBA4SL" OSC-SMD_4P-L3.2-W2.5-BL 183.54,248.561 r180 top
X2 "X49SM8MSD2SC" CRYSTAL-SMD_L11.5-W4.8-LS12.7 210.566,216.916 r90 top

## Footprints (in the part's own frame and the unit in brackets; to place one, negate y for a bottom-side part, rotate by r counter-clockwise, add the part's x,y. Pads: shape width x height; smd on the part's side, far side on the other; paste and mask are expansions set on the pad)
AO3401A_SOT-23-3 [mm]
  rect 1x0.8 smd paste+0 mask+0.051: 1(1.15,-0.95) 2(1.15,0.95) 3(-1.15,0)
  silkscreen extent -0.7,-1.5 0.7,1.5
BUZ-TH_BD12.0-P7.60-D0.6-FD [mm]
  round 1.8 hole 1 paste+0.051: 1(-3.8,0) 2(3.8,0)
  silkscreen extent -6,-6 6,6
C0603 [mm]
  rect 0.8x0.9 smd paste+0.051: 1(-0.7,0) 2(0.7,0)
  silkscreen extent -1.41,-0.71 1.39,0.72
C0805 [mm] "Chip Capacitor, Body 2.0x1.3mm, IPC High Density"
  rect 1.1x1.4 smd: 1(-0.75,0) 2(0.75,0)
  body extent -1.1,-0.72 1.1,0.72, height 1.4
CAP-TH_BD8.0-P3.50-D0.6-FD-2 [mm]
  round 1.6 hole 1 paste+0.051: 1(-1.75,0) 2(1.75,0)
  silkscreen extent -3.96,-4 4.04,4
CONN-TH_XH2.54-2P [mil]
  rect 60x60 hole 39.37 slot 41.34 at 0 deg paste+0 mask+1.97: 1(-49.22,0) 2(49.21,0)
  silkscreen extent -150,-90 145,145
CRYSTAL-SMD_L11.5-W4.8-LS12.7 [mm]
  rect 5.5x2 smd paste+0.051: 1(-4.45,0) 2(4.45,0)
  silkscreen extent -5.7,-2.4 5.7,2.4
ESOP-8_L4.9-W3.9-P1.27-LS6.0-BL-EP [mm]
  rect 0.6x1.2 smd paste+0.051: 1(-1.905,-2.908) 2(-0.635,-2.908) 3(0.635,-2.908) 4(1.905,-2.908) 5(1.905,2.908) 6(0.635,2.908) 7(-0.635,2.908) 8(-1.905,2.908)
  rect 3.3x2.4 smd paste+0.051: 9(0,0)
  silkscreen extent -3.2,-2.67 2.55,2.05
HDR-TH_2P-P2.54-V-M-1 [mm]
  rect 1.8x1.8 hole 1 paste+0.051: 1(-1.27,0)
  round 1.8 hole 1 paste+0.051: 2(1.27,0)
  silkscreen extent -2.54,-1.27 2.54,1.27
HDR-TH_3P-P2.54-V-M [mm]
  rect 1.7x1.7 hole 1.1 paste+0.051: 1(-2.54,0)
  round 1.7 hole 1.1 paste+0.051: 2(0,0) 3(2.54,0)
  silkscreen extent -3.81,-1.25 3.81,1.25
HDR-TH_4P-P2.54-V-F [mm]
  rect 1.7x1.7 hole 1.1 paste+0.051: 1(-3.81,0)
  round 1.7 hole 1.1 paste+0.051: 2(-1.27,0) 3(1.27,0) 4(3.81,0)
  silkscreen extent -5.29,-1.27 5.29,1.27
HDR-TH_5P-P2.54-V-M [mm]
  rect 1.7x1.7 hole 1.1 paste+0.051: 1(-5.08,0)
  round 1.7 hole 1.1 paste+0.051: 2(-2.54,0) 3(0,0) 4(2.54,0) 5(5.08,0)
  silkscreen extent -6.35,-1.27 6.35,1.27
IND-SMD_L7.3-W6.8 [mm]
  rect 2.35x3.5 smd paste+0.051: 1(-3,0) 2(3,0)
  silkscreen extent -3.5,-3.3 3.5,3.3
Key_SMD_3.6x6.1x2.5 [mil]
  rect 59.1x39.4 smd paste+0 mask+2: 1(-155.5,0) 2(155.5,0)
  silkscreen extent -122,-73 122,73
L0603 [mm] "0603贴片叠层电感"
  rect 0.75x0.85 smd: 1(-0.725,0) 2(0.725,0)
  silkscreen extent -1.35,-0.69 1.35,0.69, body extent -0.8,-0.4 0.8,0.4, height 0.8
LED_0603 [mil]
  rect 31.5x31.5 smd paste+0 mask+2: 1(-33.5,-0.4) 2(29.5,-0.2)
  silkscreen extent -61,-30 53,30
LQFP-48_L7.0-W7.0-P0.50-LS9.0-BL [mm]
  oval 0.27x1.5 smd paste+0 mask+0.05: 1(-2.75,-4.25) 2(-2.25,-4.25) 3(-1.75,-4.25) 4(-1.25,-4.25) 5(-0.75,-4.25) 6(-0.25,-4.25) 7(0.25,-4.25) 8(0.75,-4.25) 9(1.25,-4.25) 10(1.75,-4.25) 11(2.25,-4.25) 12(2.75,-4.25) 25(2.75,4.25) 26(2.25,4.25) 27(1.75,4.25) 28(1.25,4.25) 29(0.75,4.25) 30(0.25,4.25) 31(-0.25,4.25) 32(-0.75,4.25) 33(-1.25,4.25) 34(-1.75,4.25) 35(-2.25,4.25) 36(-2.75,4.25)
  oval 1.5x0.27 smd paste+0 mask+0.05: 13(4.25,-2.75) 14(4.25,-2.25) 15(4.25,-1.75) 16(4.25,-1.25) 17(4.25,-0.75) 18(4.25,-0.25) 19(4.25,0.25) 20(4.25,0.75) 21(4.25,1.25) 22(4.25,1.75) 23(4.25,2.25) 24(4.25,2.75) 37(-4.25,2.75) 38(-4.25,2.25) 39(-4.25,1.75) 40(-4.25,1.25) 41(-4.25,0.75) 42(-4.25,0.25) 43(-4.25,-0.25) 44(-4.25,-0.75) 45(-4.25,-1.25) 46(-4.25,-1.75) 47(-4.25,-2.25) 48(-4.25,-2.75)
  silkscreen extent -3.59,-4.46 3.3,3.34
MSOP-8_L3.0-W3.0-P0.65-LS5.0-BL [mm]
  oval 0.364x1.692 smd paste+0.051: 1(-0.975,-2.146) 2(-0.325,-2.146) 3(0.325,-2.146) 4(0.975,-2.146) 5(0.975,2.146) 6(0.325,2.146) 7(-0.325,2.146) 8(-0.975,2.146)
  silkscreen extent -1.76,-2.3 1.66,1.73
MSOP-10_L3.0-W3.0-P0.50-LS5.0-BL [mm]
  oval 0.28x1.62 smd paste+0.051: 1(-1,-2.11) 2(-0.5,-2.11) 3(0,-2.11) 4(0.5,-2.11) 5(1,-2.11) 6(1,2.11) 7(0.5,2.11) 8(0,2.11) 9(-0.5,2.11) 10(-1,2.11)
  silkscreen extent -1.74,-2.26 1.58,1.07
OSC-SMD_4P-L3.2-W2.5-BL [mm]
  rect 1.4x1.2 smd paste+0.051: 1(-1.1,-0.875) 2(1.1,-0.875) 3(1.1,0.875) 4(-1.1,0.875)
  silkscreen extent -2.29,-1.9 2.07,1.72
R0603 [mm]
  rect 0.806x0.864 smd paste-100 mask+0.051: 1(-0.753,0) 2(0.753,0)
  silkscreen extent -1.39,-0.66 1.39,0.66
RELAY-SMD_HFD31-XX-L2SR [mm]
  rect 1x3.3 smd paste+0.051: 1(-5.08,-4.455) 2(-2.54,-4.455) 3(0,-4.455) 4(2.54,-4.455) 5(5.08,-4.455) 6(5.08,4.455) 7(2.54,4.455) 8(0,4.455) 9(-2.54,4.455) 10(-5.08,4.455)
  silkscreen extent -7,-5.51 7,4.5
S8050_SOT-23 [mm]
  rect 1x0.8 smd paste+0 mask+0.051: 1(1.15,-0.823) 2(1.15,1.077) 3(-1.15,0.127)
  silkscreen extent -0.7,-1.37 0.7,1.63
SMA_L4.3-W2.6-LS5.0-FD [mm]
  rect 2.046x1.62 smd paste+0.051: 1(-2.304,-0.009) 2(2.304,0.009)
  silkscreen extent -2.17,-1.32 2.19,1.29
SOD-123_L2.8-W1.8-LS3.7-RD [mm]
  rect 0.95x1.15 smd paste+0.051: 1(-1.692,0) 2(1.692,0)
  silkscreen extent -1.58,-0.87 1.41,0.87
SOP-4_L4.4-W4.0-P2.54-LS7.0-TL [mm]
  rect 1.3x0.595 smd paste+0.051: 1(-3.15,1.27) 2(-3.15,-1.27) 3(3.15,-1.27) 4(3.15,1.27)
  silkscreen extent -3.02,-2.08 1.97,2.09
SOP-8_L4.9-W3.9-P1.27-LS6.0-BL [mm]
  oval 0.63x1.865 smd paste+0.051: 1(-1.905,-2.682) 2(-0.635,-2.682) 3(0.635,-2.682) 4(1.905,-2.682) 5(1.905,2.682) 6(0.635,2.682) 7(-0.635,2.682) 8(-1.905,2.682)
  silkscreen extent -2.82,-2.83 2.5,2
SOP-16_L9.9-W3.9-P1.27-LS6.0-BL [mm]
  oval 0.56x1.745 smd paste+0.051: 1(-4.445,-2.872) 2(-3.175,-2.872) 3(-1.905,-2.872) 4(-0.635,-2.872) 5(0.635,-2.872) 6(1.905,-2.872) 7(3.175,-2.872) 8(4.445,-2.872) 9(4.445,2.872) 10(3.175,2.872) 11(1.905,2.872) 12(0.635,2.872) 13(-0.635,2.872) 14(-1.905,2.872) 15(-3.175,2.872) 16(-4.445,2.872)
  silkscreen extent -5.33,-3.02 5.08,1.77
SOT-23-3_L2.9-W1.3-P1.90-LS2.4-BR [mm]
  rect 1.25x0.7 smd paste+0.051: 1(1,-0.95) 2(1,0.95) 3(-1,0)
  silkscreen extent -0.73,-1.53 0.73,1.53
SOT-23-3_L3.0-W1.7-P0.95-LS2.9-BR [mm]
  rect 1.037x0.532 smd paste+0.051: 1(1.101,-0.95) 2(1.101,0.95) 3(-1.101,0)
  silkscreen extent -0.86,-1.53 0.86,1.53
SOT-23-5_L3.0-W1.7-P0.95-LS2.8-BR [mm]
  rect 1.1x0.6 smd paste+0.051: 1(1.3,-0.95) 2(1.3,0) 3(1.3,0.95) 4(-1.3,0.95) 5(-1.3,-0.95)
  silkscreen extent -0.9,-1.55 0.9,1.55
SOT-23-6_L2.9-W1.6-P0.95-LS2.8-BL [mm]
  rect 0.532x1.072 smd paste+0.051: 1(-0.95,-1.149) 2(0,-1.149) 3(0.95,-1.149) 4(0.95,1.149) 5(0,1.149) 6(-0.95,1.149)
  silkscreen extent -1.82,-1.45 1.54,0.89
SW-TH_4P-L6.0-W6.0-P4.50-LS6.5 [mm]
  round 1.8 hole 1.2 paste+0.051: 1(-3.25,2.25) 2(3.25,2.25) 3(-3.25,-2.25) 4(3.25,-2.25)
  silkscreen extent -3,-3 3,3
SW-TH_6P-L7.0-W7.0-P2.00 [mm]
  rect 1.6x1.6 hole 1 paste+0.051: 1(2.5,2)
  round 1.6 hole 1 paste+0.051: 2(2.5,0) 3(2.5,-2) 4(-2.5,2) 5(-2.5,0) 6(-2.5,-2)
  silkscreen extent -3.6,-3.6 4.06,4.06
TSSOP-14_L5.0-W4.4-P0.65-LS6.4-BL [mm]
  rect 0.4x1.7 smd paste+0.051: 1(-1.95,-2.8) 2(-1.3,-2.8) 3(-0.65,-2.8) 4(0,-2.8) 5(0.65,-2.8) 6(1.3,-2.8) 7(1.95,-2.8) 8(1.95,2.8) 9(1.3,2.8) 10(0.65,2.8) 11(0,2.8) 12(-0.65,2.8) 13(-1.3,2.8) 14(-1.95,2.8)
  silkscreen extent -2.51,-1.74 2.5,1.74
USB-C_SMD-TYPE-C-31-M-12 [mm]
  oval 1.2x2 hole 0.8 slot 1.6 at 90 deg paste+0.051: 0(-4.325,1.706) 1(4.325,1.706)
  oval 1.2x1.8 hole 0.8 slot 1.4 at 90 deg paste+0.051: 2(4.325,-2.474) 3(-4.325,-2.474)
  rect 0.3x1.3 smd paste-100 mask+0.051: A1(-3.35,2.474) A4(-2.55,2.474) A5(-1.25,2.474) A6(-0.25,2.474) A7(0.25,2.474) A8(1.25,2.474) A9(2.55,2.474) A12(3.35,2.474) B1(3.05,2.474) B4(2.25,2.474) B5(1.75,2.474) B6(0.75,2.474) B7(-0.75,2.474) B8(-1.75,2.474) B9(-2.25,2.474) B12(-3.05,2.474)
  Keep-Out Layer circle w0.003: c-2.9,1.206 r0.375
  Keep-Out Layer circle w0.003: c2.9,1.206 r0.375
  Keep-Out Layer region: -2.9,1.581 -2.825,1.581 -2.687,1.524 -2.582,1.418 -2.525,1.28 -2.525,1.131 -2.582,0.993 -2.687,0.888 -2.825,0.831 -2.9,0.831 -2.975,0.831 -3.112,0.888 -3.218,0.993 -3.275,1.131 -3.275,1.28 -3.218,1.418 -3.112,1.524 -2.975,1.581 -2.9,1.581 -2.9,1.581
  Keep-Out Layer region: -2.9,1.581 -2.825,1.581 -2.687,1.524 -2.582,1.418 -2.525,1.28 -2.525,1.131 -2.582,0.993 -2.687,0.888 -2.825,0.831 -2.9,0.831 -2.975,0.831 -3.112,0.888 -3.218,0.993 -3.275,1.131 -3.275,1.28 -3.218,1.418 -3.112,1.524 -2.975,1.581 -2.9,1.581 -2.9,1.581
  Keep-Out Layer region: 2.9,1.581 2.975,1.581 3.112,1.524 3.218,1.418 3.275,1.28 3.275,1.131 3.218,0.993 3.112,0.888 2.975,0.831 2.9,0.831 2.825,0.831 2.687,0.888 2.582,0.993 2.525,1.131 2.525,1.28 2.582,1.418 2.687,1.524 2.825,1.581 2.9,1.581 2.9,1.581
  Keep-Out Layer region: 2.9,1.581 2.975,1.581 3.112,1.524 3.218,1.418 3.275,1.28 3.275,1.131 3.218,0.993 3.112,0.888 2.975,0.831 2.9,0.831 2.825,0.831 2.687,0.888 2.582,0.993 2.525,1.131 2.525,1.28 2.582,1.418 2.687,1.524 2.825,1.581 2.9,1.581 2.9,1.581
  silkscreen extent -4.47,-5.09 4.47,0.49

## Part data
BAT1 P1: JLCPCB Part Class=扩?, LCSC Part Name=XH2.54直², AddInBom=yes, ConvertToPcb=yes, Device=XH2.54直², FootprintName=CONN-TH_XH2.54-2P, ManufacturerPart=XH2.54直², ModelId=dc9654a6caad4c20aab3bc231ea458cf, ModelName=CONN-TH_XH2.54-2P, ModelTransform=296.889,230.315,0,0,0,0,0,26.653,-137.795, Supplier=LCSC, Supplier Footprint=XH2.54-2, SupplierPart=C9900016957, Symbol=XH2.54直²
BUZZER1: "驱动方式:有源(内含驱动线路);构造类型:电磁式;额定电压:-;频率:2.4kHz;声压(SPL):85dB;"
C1 C2 C3: library part CAP_0603, AddInBom=yes, ConvertToPcb=yes, Device=CAP_0603, ModelId=ac125912035d415993ca9572d50418b1, ModelName=C0603_L1.6-W0.8-H0.8, ModelTransform=62.992,31.496,0,0,0,0,0,0,0, Supplier Footprint=0603, SymbolName=CapAcitance
  C1 C3: FootprintName=C0805
  C2: FootprintName=C0603
C24: "容值:220uF;精度:±20%;额定电压:35V;纹波电流:1.7A@100kHz;等效串联电阻:40mΩ@100kHz;", Equivalent Series Resistance(ESR)=40mΩ@100kHz, JLCPCB Part Class=扩?, LCSC Part Name="220uF ±20% 35V", Lifetime @ Temp=2000hrs@105℃, Manufacturer=KNSCHA(科?, Operating Temperature=-55℃~+105?, Rated Voltage=35V, Ripple Current=1.7A@100kHz, Tolerance=±20%, AddInBom=yes, ConvertToPcb=yes, Datasheet=https://atta.szlcsc.com/upload/public/pdf/source/20220426/9FC8A158D93B909CC105160B4A0CB698.pdf, Device=KNH2220UF35V149EC0049, FootprintName=CAP-TH_BD8.0-P3.50-D0.6-FD-2, L=9mm, Lead Spacing=3.5mm, ManufacturerPart=KNH2220UF35V149EC0049, ModelId=fd7be3432f664311809e69e3b3557c13, ModelName=CAP-TH_BD8.0-P3.50-D0.6-FD-2, ModelTransform=314.96,315.3537,0,90,0,0,0,0,-196.85, Supplier=LCSC, Supplier Footprint=插件,D8x, SupplierPart=C2981462, Symbol=KNH2220UF35V149EC0049, φD=8mm
C27 C28 C29 C30 C31 C32 C33 C34 C35 C36 C37 C38 C39: "贴片电容/MLCC电容", AddInBom=yes, ConvertToPcb=yes, Design Item ID=C, Device=104, Origin Footprint=C0603_M, Symbol=C
CE1 CE2 CE3 CE4 CE5: "直插电解电容", AddInBom=yes, ConvertToPcb=yes, Design Item ID=CE, Origin Footprint 1=C0805_M, Origin Footprint 2=C0805_M, Symbol=CE
  CE1: Device=3.3uF/16V
  CE2 CE3 CE4 CE5: Device=22uF/16V
D1 D2: "二极管配置:独立式;正向压降(Vf):550mV@1.0A;直流反向耐压(Vr):40V;整流电流:2A;"
D3: "二极管配置:-;正向压降(Vf):1.3V@1A;直流反向耐压(Vr):1kV;整流电流:1A;反向恢复时间(trr):500ns;"
D4 D5: "二极管配置:1对串联式;正向压降(Vf):800mV@100mA;直流反向耐压(Vr):30V;平均整流电流(Io):200mA;"
H1: library part HDR-F_2.54_1x4P, AddInBom=yes, ConvertToPcb=yes, Device=HDR-F_2.54_1x4P, FootprintName=HDR-TH_4P-P2.54-V-F, ModelId=d187812051054f85879fcaa51a310d8e, ModelName=HDR-TH_4P-P2.54-V-F, ModelTransform=419.6842,98.464,0,0,0,0,0,0,-118.11, Supplier Footprint=插?, SupplierPart=C2718488, Symbol=2.54-1*4Pĸ
H2: library part HDR-M_2.54_1x3P, AddInBom=yes, ConvertToPcb=yes, Device=HDR-M_2.54_1x3P, FootprintName=HDR-TH_3P-P2.54-V-M, ModelId=bb473b6d38ff42a99216a4fcdbdcc4cb, ModelName=HDR-TH_3P-P2.54-M-LI-1X3P, ModelTransform=299.9994,100,0,0,0,0,0,0,-118.11, Supplier Footprint=插?, SupplierPart=C2937625, Symbol=PZ254V-11-03P_C2937625
H4: library part HDR-M_2.54_1x5P, AddInBom=yes, ConvertToPcb=yes, Device=HDR-M_2.54_1x5P, FootprintName=HDR-TH_5P-P2.54-V-M, ModelId=47d466e4a34f4fc5bc626cf773a24dd5, ModelName=HDR-TH_5P-P2.54-M-LI-1X5P, ModelTransform=499.999,100,0,0,0,0,0,0,-118.11, Supplier Footprint=插?, SupplierPart=C358687, Symbol=MTP125-1105S1
L2 L6 L7 L9 L11: "标称阻抗@测试频率:1kΩ@100MHz;误差:±25%;直流电阻(RDC):650mΩ;"
L3: "电感值:10uH;精度:±20%;额定电流:4.5A;饱和电流(Isat):5.5A;类型:一体成型电感;"
Q4: library part AO3400A_N, "类型:N沟道;漏源电压(Vdss):30V;连续漏极电流(Id):5.2A;功率(Pd):1W;导通电阻(RDS(on)@Vgs,Id):35mΩ@10V,5A;阈值电压(Vgs(th)@Id):1.5V@250μA;"
Q5: "类型:1个N沟道;漏源电压(Vdss):30V;连续漏极电流(Id):5.7A;导通电阻(RDS(on)@Vgs,Id):26.5mΩ@10V,5.7A;功率(Pd):1.4W;阈值电压(Vgs(th)@Id):1.5V@250uA;"
SW1: library part Key_SMD_3.6x6.1x2.5, AddInBom=yes, ConvertToPcb=yes, Device=Key_SMD_3.6x6.1x2.5, FootprintName=Key_SMD_3.6x6.1x2.5, ModelId=90d18ad19a7e424ebd3215e1b5dcb80c0819f05c4eef4c71ace90d822a990e87, ModelName="KEY-SMD_2P-L6.0-W3.6-H2.5-LS8.0 COPY", ModelTransform=311.02,141.73,102.36,0,0,0,0,0,0, Supplier Footprint=SMD, SymbolName=Çá´
SW2 SW3 SW4 SW5: library part Key_TH_6x6x6, "触点电流:50mA;额定电压(DC):12V;绝缘电阻:100MΩ;电路结构:单刀单掷;安装方式:直插;按钮形状:圆形按钮;按钮/盖帽颜色:黑É"
SW6: "自锁/无锁:自锁;安装方式:直插;触点电流:100mA;额定电压 (AC):250V;额定电压 (DC):30V;带灯:不带;作用力:160gf;机械寿命:10万次;"
U1 U17: "放大器数:双路;增益带宽积(GBP):250MHz;输入偏置电流(Ib):1pA;输入失调电压(Vos):1.5mV;压摆率(SR):180V/us;带宽(-3db):250MHz;"
U2 U14 U16 U19 U20: JLCPCB Part Class=扩?, LCSC Part Name="高速 CMOS 差·", Manufacturer=HGSEMI(华?, AddInBom=yes, ConvertToPcb=yes, Datasheet=https://atta.szlcsc.com/upload/public/pdf/source/20200402/C507179_EDEF75F06BD662FE8D3145782CF64ACB.pdf, Device=74HC4052M/TR, FootprintName=SOP-16_L10.0-W3.9-P1.27-LS6.0-BL, ManufacturerPart=74HC4052M/TR, ModelId=ed96d47c1e844792b3e705d722a1a1fa, ModelName=SOP-16_L9.9-W3.9-P1.27-LS6.0-BL, ModelTransform=389.763,236.22,0,0,0,0,0,0,0, Supplier=LCSC, Supplier Footprint=SOP-16, SupplierPart=C507179, SymbolName=74HC4052M/TR
U3: "电源电压:2.3V~5.5V;分辨率(位):10;自宽调谐(最大值):28b;", JLCPCB Part Class=扩?, LCSC Part Name=AD9833低功, Manufacturer=ADI(亚?, ManufacturerPart=AD9833BRMZ-REEL7, Operating Temperature=-40℃~+85?, Supply Voltage=2.3V~5.5V, AddInBom=yes, ConvertToPcb=yes, Datasheet=https://atta.szlcsc.com/upload/public/pdf/source/20121029/1457706544172.pdf, Device=AD9833BRMZ-REEL7_C9652, FootprintName=MSOP-10_L3.0-W3.0-P0.50-LS5.0-BL, ModelId=b42a31f9e1fa4643bc7ea573b9bba7ed, ModelName=MSOP-10_L3.0-W3.0-H1.1-LS5.0-P0.50, ModelTransform=118.11,196.85,0,0,0,0,0,0,0, Resolution (Bits)=10, Supplier=LCSC, Supplier Footprint=MSOP-10, SupplierPart=C9652, Symbol=AD9833BRMZ, The main FCLK=25MHz, Tuning  Word Width(Max)=28b
U4: JLCPCB Part Class=扩?, Manufacturer=STC, AddInBom=yes, ConvertToPcb=yes, Datasheet=https://atta.szlcsc.com/upload/public/pdf/source/20241226/E8981118341CB9C62D3D58EFD7554832.pdf, Device=STC32G12K128-35I-LQFP48, FootprintName=LQFP-48_L7.0-W7.0-P0.50-LS9.0-BL, LCSC Part Name=STC32G12K128-35I-LQFP48, ManufacturerPart=STC32G12K128-35I-LQFP48, ModelId=093be70396ff421eb2cdb946d5311efc, ModelName=LQFP-48_L7.0-W7.0-H1.4-LS9.0-P0.50, ModelTransform=354.331,354.331,0,0,0,0,0,0,0, Supplier=LCSC, Supplier Footprint=LQFP-48(7x7), SupplierPart=C5210760, Symbol=STC32G12K128-35I-LQFP48
U5: JLCPCB Part Class=扩?, LCSC Part Name=USB转串, Manufacturer=WCH(南?, AddInBom=yes, ConvertToPcb=yes, Datasheet=https://atta.szlcsc.com/upload/public/pdf/source/20230530/6E401E9554E9F5311886CC8B3F89B62E.pdf, Device=CH340N, FootprintName=SOP-8_L4.9-W3.9-P1.27-LS6.0-BL, ManufacturerPart=CH340N, ModelId=75c24a7891ee4dd6bdac16a7163ff87e, ModelName=SOP-8_L4.9-W3.9-P1.27-LS6.0-BL-1, ModelTransform=192.913,236.22,0,0,0,0,0,0,0, Supplier=LCSC, Supplier Footprint=SOP-8, SupplierPart=C2977777, Symbol=CH340N_C2977777
U6: "锂电池充电芯片 42代表电池满电电压4.2V。", JLCPCB Part Class=扩?, Manufacturer=TOPPOWER(南?, AddInBom=yes, ConvertToPcb=yes, Datasheet=https://atta.szlcsc.com/upload/public/pdf/source/20190626/C16581_611BCF5D7CF554EAE465137A8F68DB3E.pdf, Device=TP4056-42-ESOP8, FootprintName=ESOP-8_L4.9-W3.9-P1.27-LS6.0-BL-EP, LCSC Part Name=TP4056-42-ESOP8, ManufacturerPart=TP4056-42-ESOP8, ModelId=d3e00daa36c445139c055a3b9efb85d2, ModelName=ESOP-8_L4.9-W3.9-H1.6-LS6.0-P1.27, ModelTransform=240.157,192.913,0,90,0,0,0,0,0, Supplier=LCSC, Supplier Footprint=ESOP-8, SupplierPart=C16581, Symbol=TP4056
U7: library part RT9193, AddInBom=yes, ConvertToPcb=yes, Design Item ID=RT9193, Device=RT9193, Origin Footprint=SOT23-5, Symbol=RT9193
U9: "放大器数:四路;增益带宽积(GBP):4.5MHz;压摆率(SR):2.7V/us;", JLCPCB Part Class=扩?, LCSC Part Name=精密Ô, Manufacturer=RUNIC(润?, Operating Temperature=-40℃~+125?, Supply Voltage=2.7V~5.5V, AddInBom=yes, ConvertToPcb=yes, Datasheet=https://atta.szlcsc.com/upload/public/pdf/source/20180801/C255431_5DFA0183D1ACA7F14A60743D93152121.pdf, Device=RS8554XQ, FootprintName=TSSOP-14_L5.0-W4.4-P0.65-LS6.4-BL, Gain Bandwidth Product(GBP)=4.5MHz, ManufacturerPart=RS8554XQ, ModelId=02f1f60386074b2ca8e111040ac061f2, ModelName=TSSOP-14_L5.0-W4.4-H1.0-LS6.4-P0.65, ModelTransform=237.007,196.85,0,90,0,0,0,0,0, Number of Circuits=四?, Relevance=|, Slew Rate(SR)=2.7V/us, Supplier=LCSC, Supplier Footprint=TSSOP-14, SupplierPart=C255429, Symbol=RS8554XQ
U10: "功能类型:升压型;输出类型:可调;工作电压:2V~24V;输出电压:28V;输出电流:2A;"
U11 U18: "放大器数:四路;增益带宽积(GBP):4.5MHz;输入偏置电流(Ib):1pA;压摆率(SR):2.7V/us;轨到轨:-;"
U12: "导通电阻(Ron@VCC):350Ω;", JLCPCB Part Class=扩?, Manufacturer=XBLW(о?, On-State Resistance (Max)=350Ω, Operating Temperature=-40℃~+85?, Supply Voltage=3V~9V, AddInBom=yes, ConvertToPcb=yes, Datasheet=https://atta.szlcsc.com/upload/public/pdf/source/20231215/0C9D8E7420B1DBE63C1B545CF8B3B4AB.pdf, Device=CD4053BDTR(XBLW), FootprintName=SOP-16_L9.9-W3.9-P1.27-LS6.0-BL, LCSC Part Name=CD4053BDTR(XBLW), ManufacturerPart=CD4053BDTR(XBLW), ModelId=ed96d47c1e844792b3e705d722a1a1fa, ModelName=SOP-16_L9.9-W3.9-P1.27-LS6.0-BL, ModelTransform=389.763,236.22,0,0,0,0,0,0,0, Supplier=LCSC, Supplier Footprint=SOP-16, SupplierPart=C19708120, Symbol=CD4053BDTR(XBLW)
U13: "触点形式:-;适用负载类型:-;正向压降(Vf):1.2V;负载电压:40V;连续负载电流:2.5A;导通电阻:60mΩ;"
USBC1: "连接器类型:Type-C;标准:-;公母:母;安装方式:-;触点数量:16P;端口数量:1;额定电流 - 电源:5A;工作温度范围:-;"
X1: "频率:25MHz;常温频差:±10ppm;输出模式:CMOS;工作电压:1.8V~3.3V;工作电流:5mA;频率稳定度:±20ppm;"
X2: "晶振类型:贴片晶振;频率:8MHz;常温频差:±20ppm;外接负载电容:20pF;频率稳定度(全温):±30ppm;"
C4 C5 C6 C7 C8 C10 C11 C12 C13 C14 C15 C16 C17 C18 C19 C25 C40 C41 C44 C46 C47 C48 C53 C54 C55 C56 C57 C61 C65 C66 C67 C68 C69 C70 C71 C73 C76 C77 C78 C79: AddInBom=yes, ConvertToPcb=yes, Device=CAP_0603, FootprintName=C0603, ModelId=ac125912035d415993ca9572d50418b1, ModelName=C0603_L1.6-W0.8-H0.8, ModelTransform=62.992,31.496,0,0,0,0,0,0,0, Supplier Footprint=0603, SymbolName=CapAcitance
C9 C20 C26 C42 C43 C45: AddInBom=yes, ConvertToPcb=yes, Device=CAP_0805, FootprintName=C0805, ModelId=1ba041120af144c991958decab20d241, ModelName=C0805_L2.0-W1.3-H1.3, ModelTransform=78.74,51.181,0,0,0,0,0,0.0005,0, Supplier Footprint=0805, SymbolName=CapAcitance
C21 C22 C23: AddInBom=yes, ConvertToPcb=yes, Device=CAP_0805, FootprintName=C0603, ModelId=1ba041120af144c991958decab20d241, ModelName=C0805_L2.0-W1.3-H1.3, ModelTransform=78.74,51.181,0,0,0,0,0,0.0005,0, Supplier Footprint=0805, SymbolName=CapAcitance
C49 C50 C51 C52 C58 C59 C60 C62 C63 C64 C74 C75 C80 C81 C82 C83 C84: AddInBom=yes, ConvertToPcb=yes, Device=CAP_0402, FootprintName=C0603, ModelId=36a51122f27c49738f86b3bfa98863e0, ModelName=C0402_L1.0-W0.5-H0.5, ModelTransform=39.37,19.685,0,0,0,0,0,0,0, Supplier Footprint=0402, SymbolName=CapAcitance
C72: AddInBom=yes, ConvertToPcb=yes, Device=CAP_0603, FootprintName=C0805, ModelId=ac125912035d415993ca9572d50418b1, ModelName=C0603_L1.6-W0.8-H0.8, ModelTransform=62.992,31.496,0,0,0,0,0,0,0, Supplier Footprint=0603, SymbolName=CapAcitance
H3: AddInBom=yes, ConvertToPcb=yes, Device=HDR-M_2.54_1x2P, FootprintName=HDR-TH_2P-P2.54-V-M-1, ModelId=79b2e9f2d70a4d68a1b7098f27c6d4c5, ModelName=HDR-M-2.54_1x2, ModelTransform=200,100,0,0,0,0,0,0,-118.11, Supplier Footprint=插?, SupplierPart=C124375, Symbol="210S-1*2P L=11.6MMGold-plated black"
L1 L4 L5 L8 L10: AddInBom=yes, ConvertToPcb=yes, Device=L_0603, FootprintName=L0603, ModelId=2bc5ec593d464d6ba9807aec0b5673c2, ModelName=L0603_L1.6-W0.8-H0.5_BEAD, ModelTransform=62.992,31.496,0,180,0,0,0.094,0.629,0, Supplier Footprint=L0603, Symbol=SDFL1608S100KTF
LED1 LED2 LED3 LED4 LED5 LED6: 3D Model=dd8257b0d61a4cd7b68939a056e08095, 3D Model Transform=58.72,29.4,22.03,0,0,0,0,0,0, Add into BOM=yes, Convert to PCB=yes, Device=LED_0603-R, FootprintName=LED_0603, ModelName=LED-0603_R, Supplier Footprint=0603, Symbol=LED_R
Q1 Q3: AddInBom=yes, ConvertToPcb=yes, Device=AO3401A_P, FootprintName=AO3401A_SOT-23-3, ModelId=c62791f0466c4ae2a892c056b845b0ca, ModelName=SOT-23-3P_L2.9-W1.3-H1.0-LS2.4-P0.95, ModelTransform=98.6,114.12,41.29,180,0,0,0,0,0, Supplier Footprint=SOT-23-3L, SupplierPart=C15127, Symbol=P_MOS
Q2 Q6 Q7: AddInBom=yes, ConvertToPcb=yes, Device=S8050_SOT_NPN, FootprintName=S8050_SOT-23, ModelId=c62791f0466c4ae2a892c056b845b0ca, ModelName=SOT-23-3P_L2.9-W1.3-H1.0-LS2.4-P0.95, ModelTransform=98.6,114.12,41.29,180,0,0,0,0,-3, Supplier Footprint=SOT-23, SymbolName=NPN
R1 R2 R3 R4 R5 R6 R7 R8 R9 R10 R11 R13 R16 R17 R19 R22 R24 R25 R26 R27 R28 R29 R30 R31 R32 R33 R34 R35 R36 R37 R38 R39 R40 R41 R42 R43 R44 R45 R46 R47 R48 R49 R50 R51 R52 R53 R54 R55 R56 R57 R58 R59 R60 R61 R62 R63 R64 R65 R66 R67 R68 R69 R70 R71 R72 R73 R74 R75 R76 R77 R78 R79 R80 R81 R82 R83 R84 R85 R86 R87 R88 R89 R90 R91 R92 R93 R94 R95 R96 R97 R98 R99 R100 R101 R102: AddInBom=yes, ConvertToPcb=yes, Device=Res_0603, FootprintName=R0603, ModelId=fc143cca1e79419f9cd78b61e9279f08, ModelName=R0603, ModelTransform=31.8897,63.7794,0,90,0,0,0,0,0, Supplier Footprint=0603, Symbol=电?
R12 R20 R21: Add into BOM=yes, Convert to PCB=yes, Device=Res_0603, FootprintName=R0603, ModelId=fc143cca1e79419f9cd78b61e9279f08, ModelName=R0603, ModelTransform=31.8897,63.7794,0,90,0,0,0,0,0, Supplier Footprint=0603, Symbol=电?
R14 R15 R18 R23: AddInBom=yes, ConvertToPcb=yes, Device=Res_0805, FootprintName=R0603, ModelId=37a81e68749a4138bd2dfa6897b24b85, ModelName=R0805_L2.0-W1.3-H0.6, ModelTransform=78.74,51.181,0,0,0,0,0,-0.0005,0, Supplier Footprint=0805, Symbol=电?
U8: AddInBom=yes, ConvertToPcb=yes, Design Item ID=SGM3204, Device=SGM3204, Origin Footprint=SOT23-6, Symbol=SGM3204
U15: AddInBom=yes, ConvertToPcb=yes, Device=hfd31/5, FootprintName=hfd31/5, SymbolName=hfd31/5

## Nets (pads, with @x,y where several pads share a name; then routed paths per layer and width w, separated by ;. In a path a pad name is that pad's centre, name@x,y a point inside that pad or via, vN(x,y) a via of type N, cw(c..) or ccw(c..) an arc to the next point about the centre after c; other vN are vias at no path point)
0ANGLE_SW: U4.33 U15.2
52_S0_DDS: U2.10 U4.39
52_S0_FIL: U4.41 U19.10
52_S0_G: U4.25 U16.10
52_S1_DDS: U2.9 U4.40
52_S1_FIL: U4.42 U19.9
52_S1_G: U4.24 U16.9
53_S1_IO: U4.37 U12.11
53_S3_IO: U4.32 U12.9
90ANGLE_SW: U4.35 U15.4
+1.4V_VREF: R36.2 R49.2
+2.8V_VREF: C17.1 C18.1 C19.1 L2.2 U4.16
+5V: C22.2 D3.1 Q1.2 Q3.2 R18.2 SW6.1 U5.5 U15.1
+5V_MCU: BUZZER1.1 C8.2 C12.2 C35.2 CE5.1 H1.2 L1.1 P1.2 Q1.3 R11.2 R12.1 R20.1 R21.1 R22.1 U4.15 U7.1 U7.3 X1.4
+A2.8V: C20.1 C27.2 C28.2 C29.2 C30.2 C36.2 C39.2 CE2.1 CE3.1 D4.2 D5.2 L2.1 L4.2 L7.2 L8.2 L11.1 R29.1 U7.5 U8.2 U8.5 U12.16 U14.16 U16.16 U19.16 U20.16
-A2.8V: C31.2 C32.2 C33.2 C34.2 C37.2 CE4.1 D4.1 D5.1 L5.2 L6.1 L9.1 L10.2 U8.1 U12.7 U14.7 U16.7 U19.7 U20.7
ADC_OUT: C55.1 C57.1 H3.1 R48.2 U4.46
ADC_VBAT: C40.2 R28.1 R32.2 U4.47
AGND: C1.1 C2.2 C4.1 C6.1 C7.1 C9.1 C10.1 C27.1 C28.1 C29.1 C30.1 C31.1 C32.1 C33.1 C34.1 C35.1 C36.1 C37.1 C38.1 C39.1 C41.2 C47.2 C48.2 C49.2 C50.2 C52.1 C53.2 C54.2 C55.2 C61.2 C63.2 C64.2 C71.2 C74.2 C76.1 C77.1 C78.1 C79.1 C80.2 CE2.2 CE3.2 CE4.2 CE5.2 H2.3 H3.2 H4.1 P1.1 Q6.2 Q7.2 R9.2 R31.2 R37.2 R40.1 R41.2 R50.2 R61.2 R66.2 R70.1 R71.2 R75.2 R76.1 R83.2 R85.2 R86.1 R87.1 R88.1 R89.1 R90.1 R91.1 R97.2 U1.4 U2.6 U2.7 U2.8 U3.9 U7.2 U8.4 U12.2 U12.6 U12.8 U13.2 U14.6 U14.8 U16.6 U16.8 U19.6 U19.8 U20.6 U20.8
BUZZER: R17.1 U4.22
CHRG: LED5.1 U4.30 U6.7
D+: U5.1 USBC1.A6 USBC1.B6
D-: U5.2 USBC1.A7 USBC1.B7
DDS_5V: C2.1 C5.1 C7.2 C9.2 C10.2 L1.2 R10.1 U1.8 U2.16 U3.2
DDS_SIGN: C3.1 C6.2 U3.10
DDS_VOUT: R43.2 U1.6 U1.7
FSYNC: U3.8 U4.26
GND: C8.1 C11.1 C12.1 C13.1 C14.1 C15.2 C16.2 C17.2 C18.2 C19.2 C20.2 C21.1 C22.1 H1.1 LED1.1 LED2.1 LED3.1 LED4.1 Q2.2 Q5.2 R23.1 R37.1 R38.2 R57.1 SW1.2 SW2.3 SW2.4 SW3.3 SW3.4 SW4.3 SW4.4 SW5.3 SW5.4 U3.4 U4.17 U5.3 X1.2
I_SIGE1: H2.1 R99.1 U12.5
IO1: R59.2 R60.1 U4.27
IO2: R51.1 U4.9
IR_S0: U4.7 U20.10
IR_S1: U4.8 U20.9
KEY1: SW2.1 U4.4
KEY2: SW3.1 U4.3
KEY3: SW4.1 U3.5 U4.2 X1.3
KEY4: SW5.1 U4.1
LED1: R13.1 R56.2 U4.45
LED2: R16.1 U4.44
LED3: R19.1 U4.43
NetBUZZER1_2: BUZZER1.2 Q2.3
NetC1_2: C1.2 R1.1
NetC3_2: C3.2 U2.3
NetC4_2: C4.2 R3.2 U1.5
NetC5_2: C5.2 U3.1
NetC11_2: C11.2 U3.3
NetC16_1: C16.1 U4.13
NetC21_2: C21.2 U5.8
NetC23_1: C23.1 U5.4
NetC23_2: C23.2 Q3.1 R18.1
NetC38_2: C38.2 U7.4
NetC41_1: C41.1 L4.1 R35.2
NetC47_1: C47.1 R35.1 R40.2 U9.5
NetC48_1: C48.1 L5.1
NetC49_1: C49.1 L6.2 U11.11
NetC50_1: C50.1 C51.2 R43.1
NetC51_1: C51.1 R41.1 R42.2
NetC52_2: C52.2 L7.1 U11.4
NetC53_1: C53.1 C56.1 R46.1 R47.2
NetC54_1: C54.1 R47.1 U9.10
NetC56_2: C56.2 Q6.3
NetC57_2: C57.2 Q7.3
NetC58_1: C58.1 C60.1 R63.2 U11.8
NetC58_2: C58.2 R63.1 R65.2 U11.9
NetC59_1: C59.1 H4.4 R62.1
NetC59_2: C59.2 R61.1 R64.1
NetC60_2: C60.2 R67.2
NetC61_1: C61.1 L8.1 U17.8
NetC62_1: C62.1 D5.3 H4.3 R72.2
NetC62_2: C62.2 R66.1 R69.1
NetC63_1: C63.1 L9.2 U18.11
NetC64_1: C64.1 R68.2 R70.2 U11.10
NetC65_2: C65.2 R76.2 U17.3
NetC66_1: C66.1 R78.2
NetC66_2: C66.2 C67.2 C68.2 C69.2 U17.1 U17.2
NetC67_1: C67.1 R79.2
NetC68_1: C68.1 R80.2
NetC69_1: C69.1 R81.2
NetC70_2: C70.2 U16.13 U17.6
NetC71_1: C71.1 L10.1 U17.4
NetC73_1: C73.1 R84.2 R86.2
NetC73_2: C73.2 U19.13
NetC74_1: C74.1 L11.2 U18.4
NetC75_1: C75.1 C83.1 H4.2 R72.1 R82.1 R92.1 R94.1 R95.1 R98.1
NetC75_2: C75.2 U18.1 U20.3
NetC76_2: C76.2 R78.1 R87.2 U19.12
NetC77_2: C77.2 R79.1 R88.2 U19.14
NetC78_2: C78.2 R80.1 R89.2 U19.15
NetC79_2: C79.2 R81.1 R90.2 U19.11
NetC80_1: C80.1 R91.2 R96.2 U18.10
NetC81_1: C81.1 U20.13
NetC81_2: C81.2 R83.1 R93.1
NetC82_1: C82.1 C84.2 R101.1 U18.8
NetC82_2: C82.2 R99.2
NetC83_2: C83.2 R97.1 R102.1
NetC84_1: C84.1 R100.2 R101.2 U18.9
NetCE1_1: CE1.1 U8.6
NetCE1_2: CE1.2 U8.3
NetD1_1: D1.1 L3.1 U10.1
NetD3_2: D3.2 Q5.3 U15.10
NetD4_3: D4.3 H4.5 R58.1 R62.2
NetLED1_2: LED1.2 R13.2
NetLED2_2: LED2.2 R16.2
NetLED3_2: LED3.2 R19.2
NetLED4_2: LED4.2 R22.2
NetLED5_2: LED5.2 LED6.2 R24.1
NetQ1_1: Q1.1 Q3.3 R23.2
NetQ2_1: Q2.1 R17.2
NetQ4_3: Q4.3 R33.2 U10.4
NetQ5_1: Q5.1 R56.1 R57.2
NetQ6_1: Q6.1 Q7.1 R59.1 R60.2
NetR1_2: R1.2 R2.1 U1.2
NetR2_2: R2.2 R3.1 U1.1
NetR4_1: R4.1 U2.1
NetR4_2: R4.2 R5.2 R6.2 R7.2 R8.2 U1.3
NetR5_1: R5.1 U2.5
NetR6_1: R6.1 U2.2
NetR7_1: R7.1 U2.4
NetR8_1: R8.1 R9.1 R10.2
NetR11_1: R11.1 X1.1
NetR14_1: R14.1 U5.7
NetR15_1: R15.1 U5.6
NetR25_2: R25.2 USBC1.B5
NetR26_1: R26.1 USBC1.A5
NetR27_2: R27.2 U6.2
NetR29_2: R29.2 R31.1 U9.3
NetR30_1: R30.1 R34.2 U10.3
NetR36_1: R36.1 U9.6 U9.7
NetR42_1: R42.1 U11.3
NetR44_1: R44.1 R48.1 U9.14
NetR44_2: R44.2 R45.1 U9.13
NetR45_2: R45.2 U9.8 U9.9
NetR46_2: R46.2 U12.15
NetR49_1: R49.1 R50.1 U9.12
NetR51_2: R51.2 U13.1
NetR52_1: R52.1 R53.1 R54.1 R55.1 R58.2
NetR52_2: R52.2 U14.1
NetR53_2: R53.2 U14.5
NetR54_2: R54.2 U14.2
NetR55_2: R55.2 U13.4 U14.4
NetR64_2: R64.2 U11.5
NetR65_1: R65.1 U11.6 U11.7
NetR68_1: R68.1 U11.13 U11.14
NetR69_2: R69.2 U11.12
NetR71_1: R71.1 R73.2 U16.11
NetR73_1: R73.1 R74.1 U16.15
NetR74_2: R74.2 R77.1 U16.14
NetR75_1: R75.1 U18.3
NetR82_2: R82.2 U18.2
NetR84_1: R84.1 U17.5
NetR92_2: R92.2 U20.1 U20.12
NetR93_2: R93.2 U18.5
NetR94_2: R94.2 U20.5 U20.14
NetR95_2: R95.2 U20.2 U20.15
NetR96_1: R96.1 U18.6 U18.7
NetR98_2: R98.2 U20.4 U20.11
NetR100_1: R100.1 U18.13 U18.14
NetR102_2: R102.2 U18.12
NetU11_1: U11.1 U11.2 U13.3 U14.3
NRST: C14.2 R12.2 SW1.1 U4.14
P10: U4.5 U14.9
P11: U4.6 U14.10
P13: U4.12
P16: C13.2 U4.10 X2.1
P17: C15.1 U4.11 X2.2
P21: U4.34
P23: H1.4 R20.2 U4.36
P25: H1.3 R21.2 U4.38
P30: R15.2 U4.19
P31: R14.2 U4.20
P32: U3.7 U4.21
P34: U3.6 U4.23
P37: U4.28 U9.1
P40: U4.18
P41: LED6.1 U4.29 U6.6
P43: U4.31
P52: U4.48
PGND: BAT1.2 C24.2 C25.1 C26.1 C40.1 C42.1 C43.1 C44.1 C45.1 C46.1 Q4.2 R25.1 R26.2 R27.1 R32.1 R34.1 R38.1 R39.2 U6.1 U6.3 U6.9 U10.2 USBC1.0 USBC1.1 USBC1.2 USBC1.3 USBC1.A1 USBC1.A12 USBC1.B1 USBC1.B12
SIN: C65.1 U12.4
SOGI_VOP: C70.1 C72.2 R77.2 U9.2 U16.12 U17.7
SW: U12.10 U15.3
SW_IN: C72.1 R85.1 U12.1
V_SIGE1: H2.2 R67.1 U12.3
VBAT: BAT1.1 C26.2 C45.2 C46.2 L3.2 R28.2 R33.1 U6.5 U10.5
VBAT_OUT: C42.2 C43.2 C44.2 D1.2 D2.2 R30.2 SW6.2
VIN_5V: C24.1 C25.2 D2.1 Q4.1 R24.2 R39.1 U6.4 U6.8 USBC1.A4 USBC1.A9 USBC1.B4 USBC1.B9
pads on no net: SW2.2 SW3.2 SW4.2 SW5.2 SW6.3 SW6.4 SW6.5 SW6.6 U2.11 U2.12 U2.13 U2.14 U2.15 U9.4 U9.11 U10.6 U12.12 U12.13 U12.14 U14.11 U14.12 U14.13 U14.14 U14.15 U15.5 U15.6 U15.7 U15.8 U15.9 U16.1 U16.2 U16.3 U16.4 U16.5 U19.1 U19.2 U19.3 U19.4 U19.5 USBC1.A8 USBC1.B8

## Polygon pours and split planes (outlines as drawn)
GND on GND02 (split plane): 294.359,172.417 145.417,172.417 145.417,261.11 294.359,261.11
+5V on PWR03 (split plane): 294.359,172.417 145.417,172.417 145.417,261.11 294.359,261.11

## Silkscreen, mask and mechanical layers (free items; w line width, h text height)
Mechanical 1:
  lines w2: 144.907,261.907 144.907,171.907 294.907,171.907 ; 145.034,261.62 295.034,261.62 ; 294.869,171.907 294.869,261.907

## Dimensions
144.907,261.907 to 144.907,171.907 on Mechanical 1
145.034,261.62 to 295.034,261.62 on Mechanical 1

## Text inside footprints (layer, text, board x,y; h text height)
BUZZER1: Top Overlay "+" at 164.833,190.373 h1.27 r270